# EAGLE board 9dof_block-GiantPanel-v10 (EAGLE 6.6.0), part 1 of 16
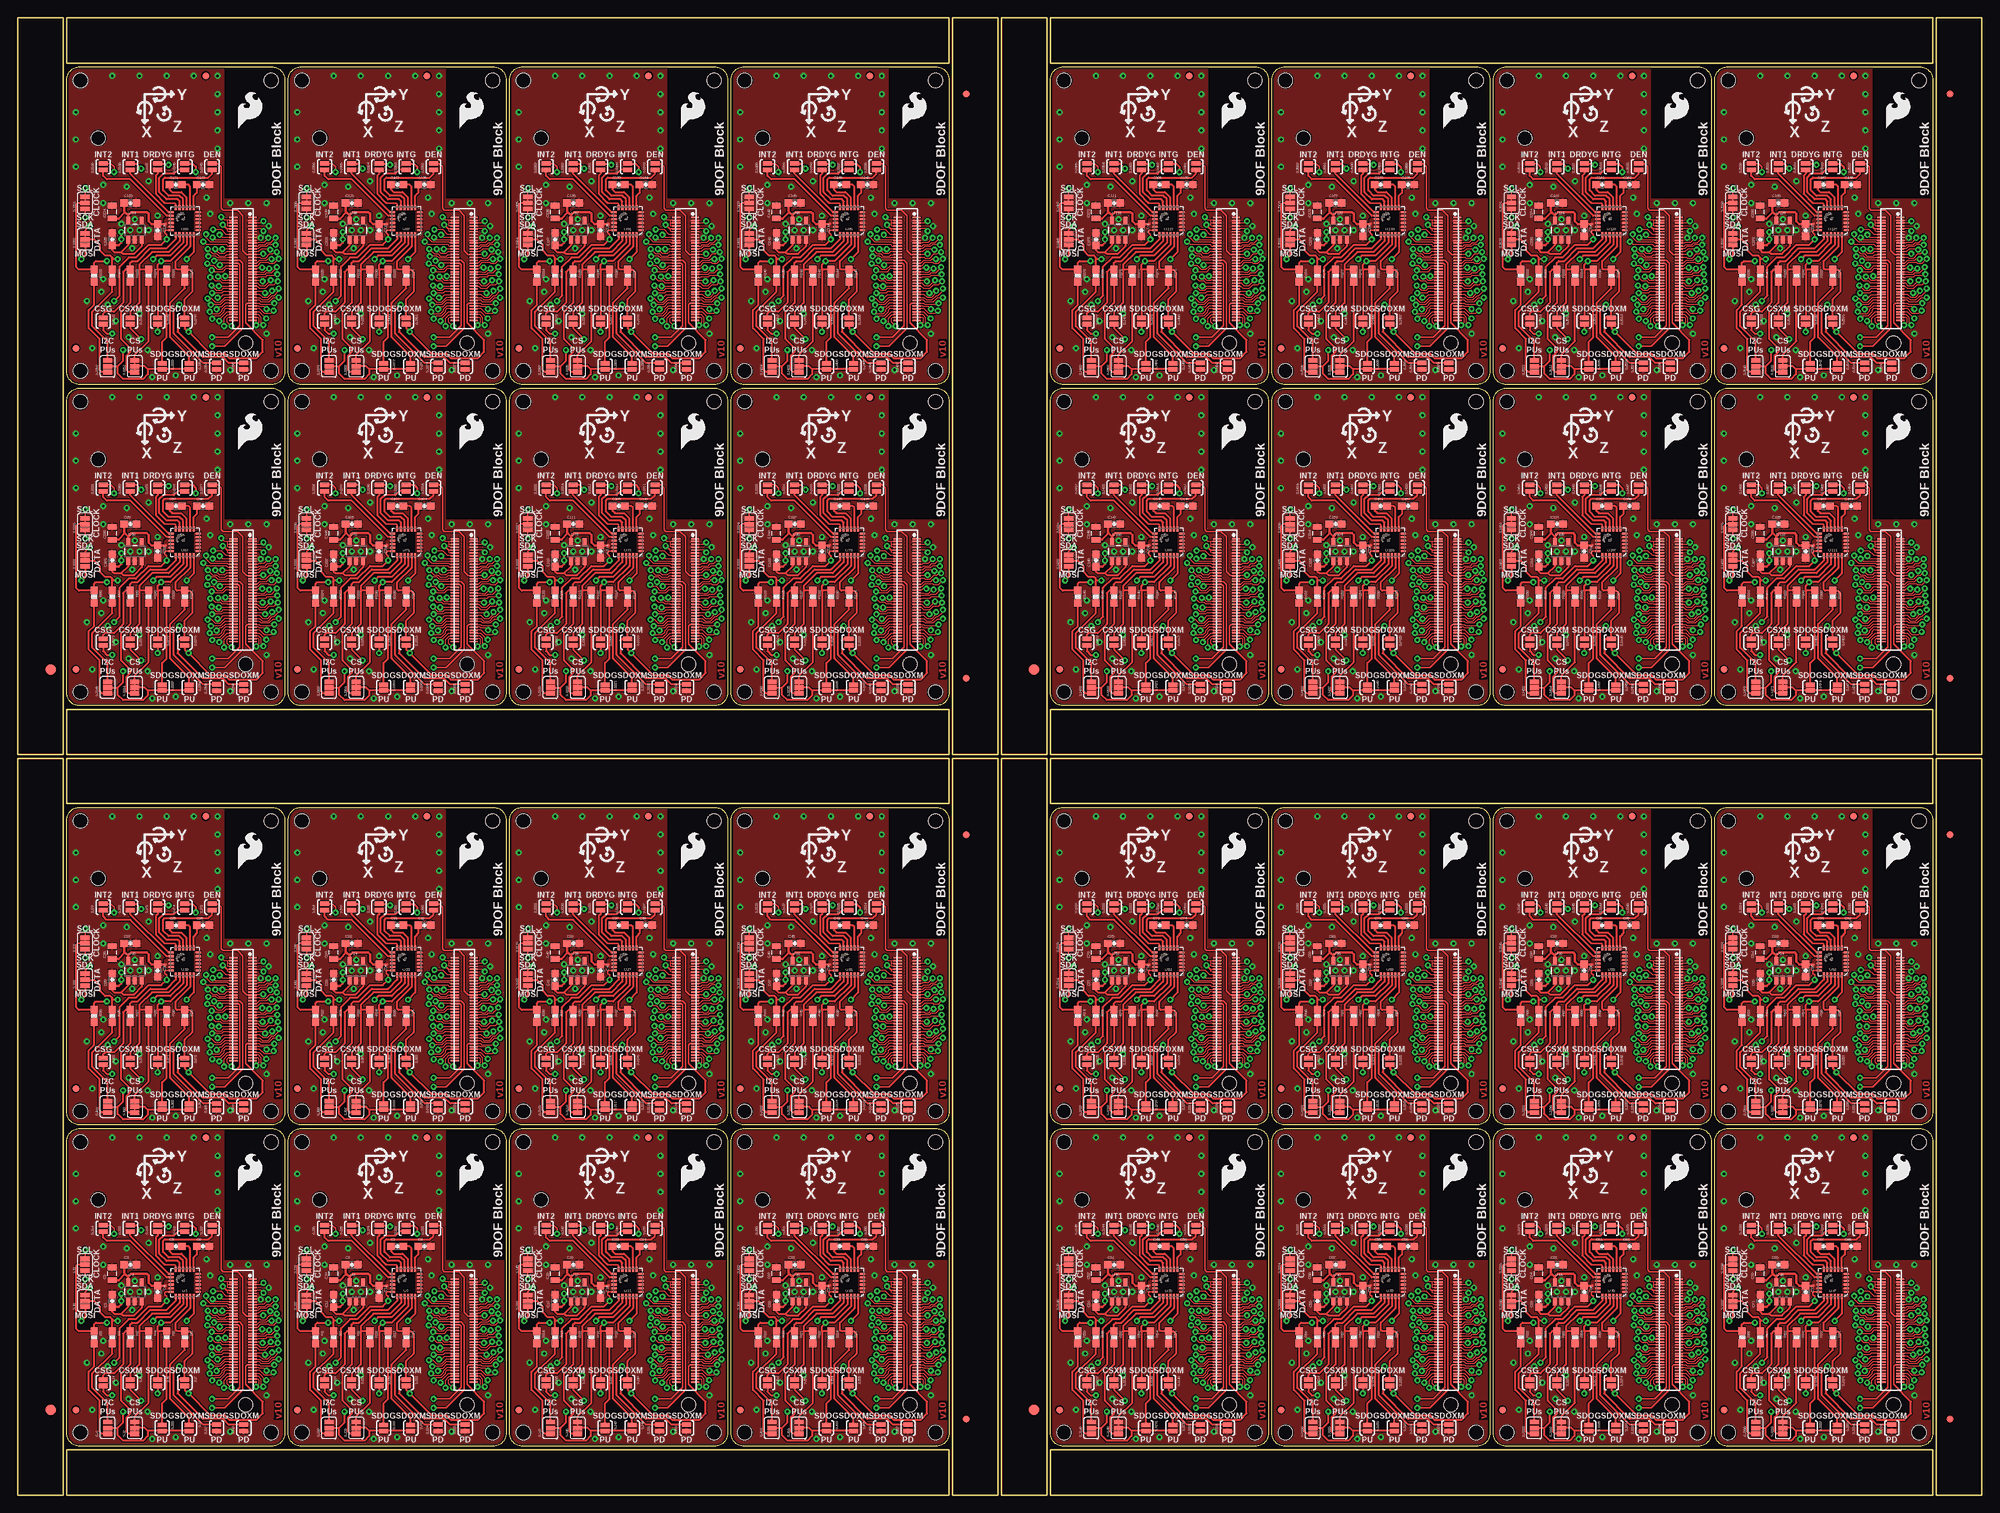
[diagram p0: board, top side]
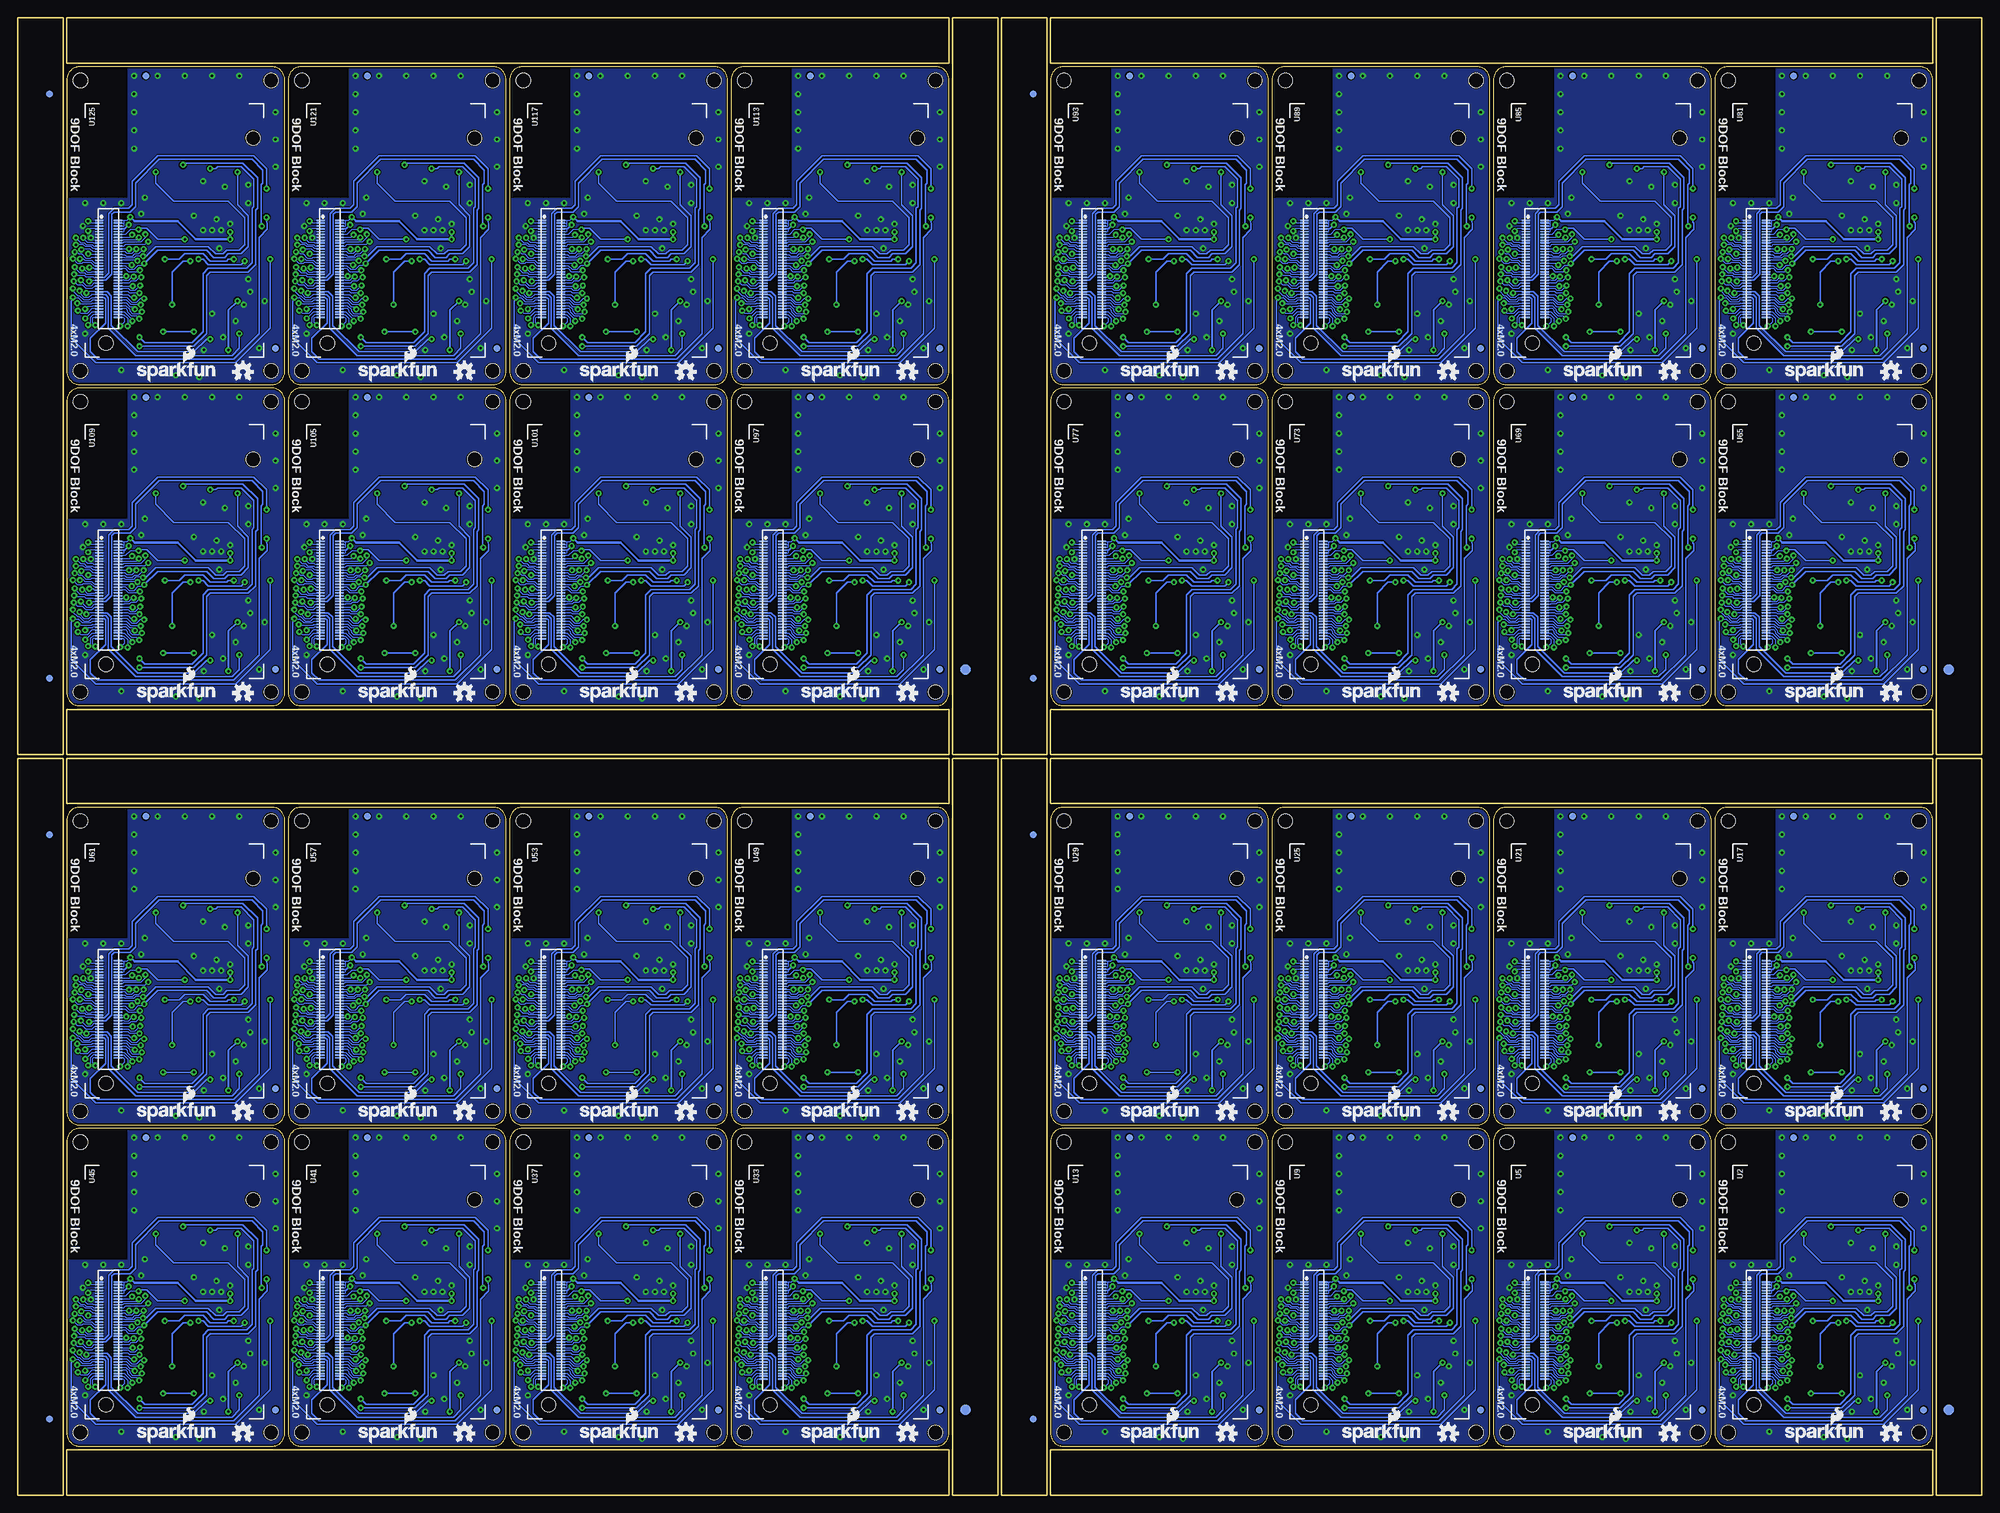
[diagram p1: board, bottom side, seen from below]

Size 274.83 x 206.76 mm. Coordinates in mm from the lower left corner, seen from the top.
Outline: 336 segments
Copper layers (1*16): Top 0.035mm / dielectric 1.5mm / Bottom 0.035mm
Design rules "SparkFun-2-layer *": minimum track width 6mil, minimum drill 13mil, track to track 6mil, track to pad 6mil, pad to pad 6mil, via to via 6mil, smd to smd 6mil, copper to edge 6mil, drill to drill 6mil, minimum pad ring 12mil, minimum via ring 10mil, stop-mask expansion 4mil, vias tented up to drill 20mil, thermal gap 6mil
Holes 2 mm at 35.43,8.76 8.76,8.76 8.76,49.4 35.43,49.4 66.42,8.76 39.75,8.76 39.75,49.4 66.42,49.4 97.41,8.76 70.74,8.76 70.74,49.4 97.41,49.4 128.4,8.76 101.73,8.76 101.73,49.4 128.4,49.4 35.43,53.72 8.76,53.72 8.76,94.36 35.43,94.36 66.42,53.72 39.75,53.72 39.75,94.36 66.42,94.36 97.41,53.72 70.74,53.72 70.74,94.36 97.41,94.36 128.4,53.72 101.73,53.72 101.73,94.36 128.4,94.36 173.1,8.76 146.43,8.76 146.43,49.4 173.1,49.4 204.09,8.76 177.42,8.76 177.42,49.4 204.09,49.4 235.08,8.76 208.41,8.76 208.41,49.4 235.08,49.4 266.06,8.76 239.4,8.76 239.4,49.4 266.06,49.4 173.1,53.72 146.43,53.72 146.43,94.36 173.1,94.36 204.09,53.72 177.42,53.72 177.42,94.36 204.09,94.36 235.08,53.72 208.41,53.72 208.41,94.36 235.08,94.36 266.06,53.72 239.4,53.72 239.4,94.36 266.06,94.36 35.43,112.39 8.76,112.39 8.76,153.03 35.43,153.03 66.42,112.39 39.75,112.39 39.75,153.03 66.42,153.03 97.41,112.39 70.74,112.39 70.74,153.03 97.41,153.03 128.4,112.39 101.73,112.39 101.73,153.03 128.4,153.03 35.43,157.35 8.76,157.35 8.76,197.99 35.43,197.99 66.42,157.35 39.75,157.35 39.75,197.99 66.42,197.99 97.41,157.35 70.74,157.35 70.74,197.99 97.41,197.99 128.4,157.35 101.73,157.35 101.73,197.99 128.4,197.99 173.1,112.39 146.43,112.39 146.43,153.03 173.1,153.03 204.09,112.39 177.42,112.39 177.42,153.03 204.09,153.03 235.08,112.39 208.41,112.39 208.41,153.03 235.08,153.03 266.06,112.39 239.4,112.39 239.4,153.03 266.06,153.03 173.1,157.35 146.43,157.35 146.43,197.99 173.1,197.99 204.09,157.35 177.42,157.35 177.42,197.99 204.09,197.99 235.08,157.35 208.41,157.35 208.41,197.99 235.08,197.99 266.06,157.35 239.4,157.35 239.4,197.99 266.06,197.99
tRestrict: area 29,33 to 37.3,51.3; area 22.1,28.4 to 24.6,31; area 59.9,33 to 68.3,51.3; area 53.1,28.4 to 55.6,31; area 90.9,33 to 99.3,51.3; area 84.1,28.4 to 86.6,31; area 121.9,33 to 130.3,51.3; area 115.1,28.4 to 117.6,31; area 29,78 to 37.3,96.3; area 22.1,73.4 to 24.6,75.9; area 59.9,78 to 68.3,96.3; area 53.1,73.4 to 55.6,75.9; 52 more areas; 224 lines
bRestrict: area 29,33 to 37.3,51.3; area 59.9,33 to 68.3,51.3; area 90.9,33 to 99.3,51.3; area 121.9,33 to 130.3,51.3; area 29,78 to 37.3,96.3; area 59.9,78 to 68.3,96.3; area 90.9,78 to 99.3,96.3; area 121.9,78 to 130.3,96.3; area 166.6,33 to 175,51.3; area 197.6,33 to 206,51.3; area 228.6,33 to 237,51.3; area 259.6,33 to 268,51.3; 20 more areas

## Footprints (pad centres in the part's own frame; a part is rotated, then mirrored left to right if it is on the bottom)
0603-CAP = smd 1.1 x 1: 1 -0.85,0; 2 0.85,0
0805 = smd 0.8 x 1.2: 1 -0.9,0; 2 0.9,0
FIDUCIAL-1.5X3 = smd 1.5 x 1.5: 1 0,0
FIDUCIAL-1X2 = smd 1 x 1: 1 0,0
0603-RES = smd 1.1 x 1: 1 -0.85,0; 2 0.85,0
PAD-JUMPER-3-NO_YES_SILK = smd 0.635 x 1.27: 1 -0.813,0; 2 0,0; 3 0.813,0
PAD-JUMPER-3-3OF3_NC_BY_TRACE_YES_SILK_FULL_BOX = smd 0.635 x 1.27: 1 -0.813,0; 2 0,0; 3 0.813,0
PAD-JUMPER-2-NC_BY_PASTE_YES_SILK = smd 0.635 x 1.27: 1 -0.401,0; 2 0.413,0
PAD-JUMPER-2-NO_YES_SILK = smd 0.635 x 1.27: 1 -0.45,0; 2 0.45,0
PAD-JUMPER-3-2OF3_NC_BY_TRACE_YES_SILK_FULL_BOX = smd 0.635 x 1.27: 1 -0.813,0; 2 0,0; 3 0.813,0
LGA-24 = smd 0.7 x 0.29: 1 -1.875,1.25; 2 -1.875,0.75; 3 -1.875,0.25; 4 -1.875,-0.25; 5 -1.875,-0.75; 6 -1.875,-1.25; 13 1.875,-1.25; 14 1.875,-0.75; 15 1.875,-0.25; 16 1.875,0.25; 17 1.875,0.75; 18 1.875,1.25 | smd 0.29 x 0.7: 7 -1.25,-1.875; 8 -0.75,-1.875; 9 -0.25,-1.875; 10 0.25,-1.875; 11 0.75,-1.875; 12 1.25,-1.875; 19 1.25,1.875; 20 0.75,1.875; 21 0.25,1.875; 22 -0.25,1.875; 23 -0.75,1.875; 24 -1.25,1.875
EDISON_DAUGHTER = smd 1.14 x 0.2: 1 1.98,19.17; 2 4.62,19.17; 3 1.98,18.77; 4 4.62,18.77; 5 1.98,18.37; 6 4.62,18.37; 7 1.98,17.97; 8 4.62,17.97; 9 1.98,17.57; 10 4.62,17.57; 11 1.98,17.17; 12 4.62,17.17; 13 1.98,16.77; 14 4.62,16.77; 15 1.98,16.37; 16 4.62,16.37; 17 1.98,15.97; 18 4.62,15.97; 19 1.98,15.57; 20 4.62,15.57; 21 1.98,15.17; 22 4.62,15.17; 23 1.98,14.77; 24 4.62,14.77; 25 1.98,14.37; 26 4.62,14.37; 27 1.98,13.97; 28 4.62,13.97; 29 1.98,13.57; 30 4.62,13.57; 31 1.98,13.17; 32 4.62,13.17; 33 1.98,12.77; 34 4.62,12.77; 35 1.98,12.37; 36 4.62,12.37; 37 1.98,11.97; 38 4.62,11.97; 39 1.98,11.57; 40 4.62,11.57; 41 1.98,11.17; 42 4.62,11.17; 43 1.98,10.77; 44 4.62,10.77; 45 1.98,10.37; 46 4.62,10.37; 47 1.98,9.97; 48 4.62,9.97; 49 1.98,9.57; 50 4.62,9.57; 51 1.98,9.17; 52 4.62,9.17; 53 1.98,8.77; 54 4.62,8.77; 55 1.98,8.37; 56 4.62,8.37; 57 1.98,7.97; 58 4.62,7.97; 59 1.98,7.57; 60 4.62,7.57; 61 1.98,7.17; 62 4.62,7.17; 63 1.98,6.77; 64 4.62,6.77; 65 1.98,6.37; 66 4.62,6.37; 67 1.98,5.97; 68 4.62,5.97; 69 1.98,5.57; 70 4.62,5.57 | hole 2: 23.53,30.67; 2.93,1.98
DF40C-70DP-0.4(51) = smd 0.2 x 1.14 bottom: 1 6.8,1.32; 2 6.8,-1.32; 3 6.4,1.32; 4 6.4,-1.32; 5 6,1.32; 6 6,-1.32; 7 5.6,1.32; 8 5.6,-1.32; 9 5.2,1.32; 10 5.2,-1.32; 11 4.8,1.32; 12 4.8,-1.32; 13 4.4,1.32; 14 4.4,-1.32; 15 4,1.32; 16 4,-1.32; 17 3.6,1.32; 18 3.6,-1.32; 19 3.2,1.32; 20 3.2,-1.32; 21 2.8,1.32; 22 2.8,-1.32; 23 2.4,1.32; 24 2.4,-1.32; 25 2,1.32; 26 2,-1.32; 27 1.6,1.32; 28 1.6,-1.32; 29 1.2,1.32; 30 1.2,-1.32; 31 0.8,1.32; 32 0.8,-1.32; 33 0.4,1.32; 34 0.4,-1.32; 35 0,1.32; 36 0,-1.32; 37 -0.4,1.32; 38 -0.4,-1.32; 39 -0.8,1.32; 40 -0.8,-1.32; 41 -1.2,1.32; 42 -1.2,-1.32; 43 -1.6,1.32; 44 -1.6,-1.32; 45 -2,1.32; 46 -2,-1.32; 47 -2.4,1.32; 48 -2.4,-1.32; 49 -2.8,1.32; 50 -2.8,-1.32; 51 -3.2,1.32; 52 -3.2,-1.32; 53 -3.6,1.32; 54 -3.6,-1.32; 55 -4,1.32; 56 -4,-1.32; 57 -4.4,1.32; 58 -4.4,-1.32; 59 -4.8,1.32; 60 -4.8,-1.32; 61 -5.2,1.32; 62 -5.2,-1.32; 63 -5.6,1.32; 64 -5.6,-1.32; 65 -6,1.32; 66 -6,-1.32; 67 -6.4,1.32; 68 -6.4,-1.32; 69 -6.8,1.32; 70 -6.8,-1.32; NC1 7.2,1.32; NC2 7.2,-1.32; NC3 -7.2,-1.32; NC4 -7.2,1.32
SOT23-5 = smd 0.55 x 1.2: 1 -0.95,-1.3; 2 0,-1.3; 3 0.95,-1.3; 4 0.95,1.3; 5 -0.95,1.3

## Placement (x,y rotation side)
C1  1.0uF  [0603-CAP]  13.21,27.18 90 top
C2  10uF  [0805]  13.21,30.99 90 top
C3  1.0uF  [0603-CAP]  15.75,32.26 0 top
C4  0.1uF  [0603-CAP]  19.56,28.45 270 top
C5  0.22uF  [0603-CAP]  22.1,34.8 0 top
C6  4.7uF  [0603-CAP]  25.91,34.8 0 top
C7  0.22uF  [0603-CAP]  53.09,34.8 0 top
C8  4.7uF  [0603-CAP]  56.9,34.8 0 top
C9  1.0uF  [0603-CAP]  46.74,32.26 0 top
C10  10uF  [0805]  44.2,30.99 90 top
C11  1.0uF  [0603-CAP]  44.2,27.18 90 top
C12  0.1uF  [0603-CAP]  50.55,28.45 270 top
C13  0.22uF  [0603-CAP]  84.07,34.8 0 top
C14  4.7uF  [0603-CAP]  87.88,34.8 0 top
C15  1.0uF  [0603-CAP]  77.72,32.26 0 top
C16  10uF  [0805]  75.18,30.99 90 top
C17  1.0uF  [0603-CAP]  75.18,27.18 90 top
C18  0.1uF  [0603-CAP]  81.53,28.45 270 top
C19  0.22uF  [0603-CAP]  115.06,34.8 0 top
C20  4.7uF  [0603-CAP]  118.87,34.8 0 top
C21  1.0uF  [0603-CAP]  108.71,32.26 0 top
C22  10uF  [0805]  106.17,30.99 90 top
C23  1.0uF  [0603-CAP]  106.17,27.18 90 top
C24  0.1uF  [0603-CAP]  112.52,28.45 270 top
C25  0.22uF  [0603-CAP]  22.1,79.76 0 top
C26  4.7uF  [0603-CAP]  25.91,79.76 0 top
C27  1.0uF  [0603-CAP]  15.75,77.22 0 top
C28  10uF  [0805]  13.21,75.95 90 top
C29  1.0uF  [0603-CAP]  13.21,72.14 90 top
C30  0.1uF  [0603-CAP]  19.56,73.41 270 top
C31  0.22uF  [0603-CAP]  53.09,79.76 0 top
C32  4.7uF  [0603-CAP]  56.9,79.76 0 top
C33  1.0uF  [0603-CAP]  46.74,77.22 0 top
C34  10uF  [0805]  44.2,75.95 90 top
C35  1.0uF  [0603-CAP]  44.2,72.14 90 top
C36  0.1uF  [0603-CAP]  50.55,73.41 270 top
C37  0.22uF  [0603-CAP]  84.07,79.76 0 top
C38  4.7uF  [0603-CAP]  87.88,79.76 0 top
C39  1.0uF  [0603-CAP]  77.72,77.22 0 top
C40  10uF  [0805]  75.18,75.95 90 top
C41  1.0uF  [0603-CAP]  75.18,72.14 90 top
C42  0.1uF  [0603-CAP]  81.53,73.41 270 top
C43  0.22uF  [0603-CAP]  115.06,79.76 0 top
C44  4.7uF  [0603-CAP]  118.87,79.76 0 top
C45  1.0uF  [0603-CAP]  108.71,77.22 0 top
C46  10uF  [0805]  106.17,75.95 90 top
C47  1.0uF  [0603-CAP]  106.17,72.14 90 top
C48  0.1uF  [0603-CAP]  112.52,73.41 270 top
C49  0.22uF  [0603-CAP]  159.77,34.8 0 top
C50  4.7uF  [0603-CAP]  163.58,34.8 0 top
C51  1.0uF  [0603-CAP]  153.42,32.26 0 top
C52  10uF  [0805]  150.88,30.99 90 top
C53  1.0uF  [0603-CAP]  150.88,27.18 90 top
C54  0.1uF  [0603-CAP]  157.23,28.45 270 top
C55  0.22uF  [0603-CAP]  190.75,34.8 0 top
C56  4.7uF  [0603-CAP]  194.56,34.8 0 top
C57  1.0uF  [0603-CAP]  184.4,32.26 0 top
C58  10uF  [0805]  181.86,30.99 90 top
C59  1.0uF  [0603-CAP]  181.86,27.18 90 top
C60  0.1uF  [0603-CAP]  188.21,28.45 270 top
C61  0.22uF  [0603-CAP]  221.74,34.8 0 top
C62  4.7uF  [0603-CAP]  225.55,34.8 0 top
C63  1.0uF  [0603-CAP]  215.39,32.26 0 top
C64  10uF  [0805]  212.85,30.99 90 top
C65  1.0uF  [0603-CAP]  212.85,27.18 90 top
C66  0.1uF  [0603-CAP]  219.2,28.45 270 top
C67  0.22uF  [0603-CAP]  252.73,34.8 0 top
C68  4.7uF  [0603-CAP]  256.54,34.8 0 top
C69  1.0uF  [0603-CAP]  246.38,32.26 0 top
C70  10uF  [0805]  243.84,30.99 90 top
C71  1.0uF  [0603-CAP]  243.84,27.18 90 top
C72  0.1uF  [0603-CAP]  250.19,28.45 270 top
C73  0.22uF  [0603-CAP]  159.77,79.76 0 top
C74  4.7uF  [0603-CAP]  163.58,79.76 0 top
C75  1.0uF  [0603-CAP]  153.42,77.22 0 top
C76  10uF  [0805]  150.88,75.95 90 top
C77  1.0uF  [0603-CAP]  150.88,72.14 90 top
C78  0.1uF  [0603-CAP]  157.23,73.41 270 top
C79  0.22uF  [0603-CAP]  190.75,79.76 0 top
C80  4.7uF  [0603-CAP]  194.56,79.76 0 top
C81  1.0uF  [0603-CAP]  184.4,77.22 0 top
C82  10uF  [0805]  181.86,75.95 90 top
C83  1.0uF  [0603-CAP]  181.86,72.14 90 top
C84  0.1uF  [0603-CAP]  188.21,73.41 270 top
C85  0.22uF  [0603-CAP]  221.74,79.76 0 top
C86  4.7uF  [0603-CAP]  225.55,79.76 0 top
C87  1.0uF  [0603-CAP]  215.39,77.22 0 top
C88  10uF  [0805]  212.85,75.95 90 top
C89  1.0uF  [0603-CAP]  212.85,72.14 90 top
C90  0.1uF  [0603-CAP]  219.2,73.41 270 top
C91  0.22uF  [0603-CAP]  252.73,79.76 0 top
C92  4.7uF  [0603-CAP]  256.54,79.76 0 top
C93  1.0uF  [0603-CAP]  246.38,77.22 0 top
C94  10uF  [0805]  243.84,75.95 90 top
C95  1.0uF  [0603-CAP]  243.84,72.14 90 top
C96  0.1uF  [0603-CAP]  250.19,73.41 270 top
C97  0.22uF  [0603-CAP]  22.1,138.43 0 top
C98  4.7uF  [0603-CAP]  25.91,138.43 0 top
C99  1.0uF  [0603-CAP]  15.75,135.89 0 top
C100  10uF  [0805]  13.21,134.62 90 top
C101  1.0uF  [0603-CAP]  13.21,130.81 90 top
C102  0.1uF  [0603-CAP]  19.56,132.08 270 top
C103  0.22uF  [0603-CAP]  53.09,138.43 0 top
C104  4.7uF  [0603-CAP]  56.9,138.43 0 top
C105  1.0uF  [0603-CAP]  46.74,135.89 0 top
C106  10uF  [0805]  44.2,134.62 90 top
C107  1.0uF  [0603-CAP]  44.2,130.81 90 top
C108  0.1uF  [0603-CAP]  50.55,132.08 270 top
C109  0.22uF  [0603-CAP]  84.07,138.43 0 top
C110  4.7uF  [0603-CAP]  87.88,138.43 0 top
C111  1.0uF  [0603-CAP]  77.72,135.89 0 top
C112  10uF  [0805]  75.18,134.62 90 top
C113  1.0uF  [0603-CAP]  75.18,130.81 90 top
C114  0.1uF  [0603-CAP]  81.53,132.08 270 top
C115  0.22uF  [0603-CAP]  115.06,138.43 0 top
C116  4.7uF  [0603-CAP]  118.87,138.43 0 top
C117  1.0uF  [0603-CAP]  108.71,135.89 0 top
C118  10uF  [0805]  106.17,134.62 90 top
C119  1.0uF  [0603-CAP]  106.17,130.81 90 top
C120  0.1uF  [0603-CAP]  112.52,132.08 270 top
C121  0.22uF  [0603-CAP]  22.1,183.39 0 top
C122  4.7uF  [0603-CAP]  25.91,183.39 0 top
C123  1.0uF  [0603-CAP]  15.75,180.85 0 top
C124  10uF  [0805]  13.21,179.58 90 top
C125  1.0uF  [0603-CAP]  13.21,175.77 90 top
C126  0.1uF  [0603-CAP]  19.56,177.04 270 top
C127  0.22uF  [0603-CAP]  53.09,183.39 0 top
C128  4.7uF  [0603-CAP]  56.9,183.39 0 top
C129  1.0uF  [0603-CAP]  46.74,180.85 0 top
C130  10uF  [0805]  44.2,179.58 90 top
C131  1.0uF  [0603-CAP]  44.2,175.77 90 top
C132  0.1uF  [0603-CAP]  50.55,177.04 270 top
C133  0.22uF  [0603-CAP]  84.07,183.39 0 top
C134  4.7uF  [0603-CAP]  87.88,183.39 0 top
C135  1.0uF  [0603-CAP]  77.72,180.85 0 top
C136  10uF  [0805]  75.18,179.58 90 top
C137  1.0uF  [0603-CAP]  75.18,175.77 90 top
C138  0.1uF  [0603-CAP]  81.53,177.04 270 top
C139  0.22uF  [0603-CAP]  115.06,183.39 0 top
C140  4.7uF  [0603-CAP]  118.87,183.39 0 top
C141  1.0uF  [0603-CAP]  108.71,180.85 0 top
C142  10uF  [0805]  106.17,179.58 90 top
C143  1.0uF  [0603-CAP]  106.17,175.77 90 top
C144  0.1uF  [0603-CAP]  112.52,177.04 270 top
C145  0.22uF  [0603-CAP]  159.77,138.43 0 top
C146  4.7uF  [0603-CAP]  163.58,138.43 0 top
C147  1.0uF  [0603-CAP]  153.42,135.89 0 top
C148  10uF  [0805]  150.88,134.62 90 top
C149  1.0uF  [0603-CAP]  150.88,130.81 90 top
C150  0.1uF  [0603-CAP]  157.23,132.08 270 top
C151  0.22uF  [0603-CAP]  190.75,138.43 0 top
C152  4.7uF  [0603-CAP]  194.56,138.43 0 top
C153  1.0uF  [0603-CAP]  184.4,135.89 0 top
C154  10uF  [0805]  181.86,134.62 90 top
C155  1.0uF  [0603-CAP]  181.86,130.81 90 top
C156  0.1uF  [0603-CAP]  188.21,132.08 270 top
C157  0.22uF  [0603-CAP]  221.74,138.43 0 top
C158  4.7uF  [0603-CAP]  225.55,138.43 0 top
C159  1.0uF  [0603-CAP]  215.39,135.89 0 top
C160  10uF  [0805]  212.85,134.62 90 top
C161  1.0uF  [0603-CAP]  212.85,130.81 90 top
C162  0.1uF  [0603-CAP]  219.2,132.08 270 top
C163  0.22uF  [0603-CAP]  252.73,138.43 0 top
C164  4.7uF  [0603-CAP]  256.54,138.43 0 top
C165  1.0uF  [0603-CAP]  246.38,135.89 0 top
C166  10uF  [0805]  243.84,134.62 90 top
C167  1.0uF  [0603-CAP]  243.84,130.81 90 top
C168  0.1uF  [0603-CAP]  250.19,132.08 270 top
C169  0.22uF  [0603-CAP]  159.77,183.39 0 top
C170  4.7uF  [0603-CAP]  163.58,183.39 0 top
C171  1.0uF  [0603-CAP]  153.42,180.85 0 top
C172  10uF  [0805]  150.88,179.58 90 top
C173  1.0uF  [0603-CAP]  150.88,175.77 90 top
C174  0.1uF  [0603-CAP]  157.23,177.04 270 top
C175  0.22uF  [0603-CAP]  190.75,183.39 0 top
C176  4.7uF  [0603-CAP]  194.56,183.39 0 top
C177  1.0uF  [0603-CAP]  184.4,180.85 0 top
C178  10uF  [0805]  181.86,179.58 90 top
C179  1.0uF  [0603-CAP]  181.86,175.77 90 top
C180  0.1uF  [0603-CAP]  188.21,177.04 270 top
C181  0.22uF  [0603-CAP]  221.74,183.39 0 top
C182  4.7uF  [0603-CAP]  225.55,183.39 0 top
C183  1.0uF  [0603-CAP]  215.39,180.85 0 top
C184  10uF  [0805]  212.85,179.58 90 top
C185  1.0uF  [0603-CAP]  212.85,175.77 90 top
C186  0.1uF  [0603-CAP]  219.2,177.04 270 top
C187  0.22uF  [0603-CAP]  252.73,183.39 0 top
C188  4.7uF  [0603-CAP]  256.54,183.39 0 top
C189  1.0uF  [0603-CAP]  246.38,180.85 0 top
C190  10uF  [0805]  243.84,179.58 90 top
C191  1.0uF  [0603-CAP]  243.84,175.77 90 top
C192  0.1uF  [0603-CAP]  250.19,177.04 270 top
E$1  [FIDUCIAL-1.5X3]  4.57,11.94 0 top
E$2  [FIDUCIAL-1.5X3]  4.57,11.94 0 bottom
E$3  [FIDUCIAL-1X2]  132.72,92.46 180 bottom
E$4  [FIDUCIAL-1X2]  132.72,10.67 0 top
E$5  [FIDUCIAL-1X2]  132.72,92.46 180 top
E$6  [FIDUCIAL-1X2]  132.72,10.67 0 bottom
E$7  [FIDUCIAL-1X2]  270.38,10.67 0 top
E$8  [FIDUCIAL-1X2]  270.38,92.46 180 top
E$9  [FIDUCIAL-1.5X3]  142.24,11.94 0 top
E$10  [FIDUCIAL-1.5X3]  142.24,11.94 0 bottom
E$11  [FIDUCIAL-1X2]  270.38,92.46 180 bottom
E$12  [FIDUCIAL-1X2]  270.38,10.67 0 bottom
E$13  [FIDUCIAL-1X2]  132.72,114.3 0 top
E$14  [FIDUCIAL-1X2]  132.72,196.09 180 top
E$15  [FIDUCIAL-1.5X3]  4.57,115.57 0 top
E$16  [FIDUCIAL-1.5X3]  4.57,115.57 0 bottom
E$17  [FIDUCIAL-1X2]  132.72,196.09 180 bottom
E$18  [FIDUCIAL-1X2]  132.72,114.3 0 bottom
E$19  [FIDUCIAL-1X2]  270.38,114.3 0 top
E$20  [FIDUCIAL-1X2]  270.38,196.09 180 top
E$21  [FIDUCIAL-1.5X3]  142.24,115.57 0 top
E$22  [FIDUCIAL-1.5X3]  142.24,115.57 0 bottom
E$23  [FIDUCIAL-1X2]  270.38,196.09 180 bottom
E$24  [FIDUCIAL-1X2]  270.38,114.3 0 bottom
FID1  FIDUCIAL1X2  [FIDUCIAL-1X2]  8.13,11.94 0 top
FID2  FIDUCIAL1X2  [FIDUCIAL-1X2]  26.29,50.04 0 top
FID3  FIDUCIAL1X2  [FIDUCIAL-1X2]  26.29,50.04 0 bottom
FID4  FIDUCIAL1X2  [FIDUCIAL-1X2]  8.13,11.94 0 bottom
FID5  FIDUCIAL1X2  [FIDUCIAL-1X2]  39.12,11.94 0 top
FID6  FIDUCIAL1X2  [FIDUCIAL-1X2]  57.28,50.04 0 top
FID7  FIDUCIAL1X2  [FIDUCIAL-1X2]  57.28,50.04 0 bottom
FID8  FIDUCIAL1X2  [FIDUCIAL-1X2]  39.12,11.94 0 bottom
FID9  FIDUCIAL1X2  [FIDUCIAL-1X2]  70.1,11.94 0 top
FID10  FIDUCIAL1X2  [FIDUCIAL-1X2]  88.27,50.04 0 top
FID11  FIDUCIAL1X2  [FIDUCIAL-1X2]  88.27,50.04 0 bottom
FID12  FIDUCIAL1X2  [FIDUCIAL-1X2]  70.1,11.94 0 bottom
FID13  FIDUCIAL1X2  [FIDUCIAL-1X2]  101.09,11.94 0 top
FID14  FIDUCIAL1X2  [FIDUCIAL-1X2]  119.25,50.04 0 top
FID15  FIDUCIAL1X2  [FIDUCIAL-1X2]  119.25,50.04 0 bottom
FID16  FIDUCIAL1X2  [FIDUCIAL-1X2]  101.09,11.94 0 bottom
FID17  FIDUCIAL1X2  [FIDUCIAL-1X2]  8.13,56.9 0 top
FID18  FIDUCIAL1X2  [FIDUCIAL-1X2]  26.29,95 0 top
FID19  FIDUCIAL1X2  [FIDUCIAL-1X2]  26.29,95 0 bottom
FID20  FIDUCIAL1X2  [FIDUCIAL-1X2]  8.13,56.9 0 bottom
FID21  FIDUCIAL1X2  [FIDUCIAL-1X2]  39.12,56.9 0 top
FID22  FIDUCIAL1X2  [FIDUCIAL-1X2]  57.28,95 0 top
FID23  FIDUCIAL1X2  [FIDUCIAL-1X2]  57.28,95 0 bottom
FID24  FIDUCIAL1X2  [FIDUCIAL-1X2]  39.12,56.9 0 bottom
FID25  FIDUCIAL1X2  [FIDUCIAL-1X2]  70.1,56.9 0 top
FID26  FIDUCIAL1X2  [FIDUCIAL-1X2]  88.27,95 0 top
FID27  FIDUCIAL1X2  [FIDUCIAL-1X2]  88.27,95 0 bottom
FID28  FIDUCIAL1X2  [FIDUCIAL-1X2]  70.1,56.9 0 bottom
FID29  FIDUCIAL1X2  [FIDUCIAL-1X2]  101.09,56.9 0 top
FID30  FIDUCIAL1X2  [FIDUCIAL-1X2]  119.25,95 0 top
FID31  FIDUCIAL1X2  [FIDUCIAL-1X2]  119.25,95 0 bottom
FID32  FIDUCIAL1X2  [FIDUCIAL-1X2]  101.09,56.9 0 bottom
FID33  FIDUCIAL1X2  [FIDUCIAL-1X2]  145.8,11.94 0 top
FID34  FIDUCIAL1X2  [FIDUCIAL-1X2]  163.96,50.04 0 top
FID35  FIDUCIAL1X2  [FIDUCIAL-1X2]  163.96,50.04 0 bottom
FID36  FIDUCIAL1X2  [FIDUCIAL-1X2]  145.8,11.94 0 bottom
FID37  FIDUCIAL1X2  [FIDUCIAL-1X2]  176.78,11.94 0 top
FID38  FIDUCIAL1X2  [FIDUCIAL-1X2]  194.94,50.04 0 top
FID39  FIDUCIAL1X2  [FIDUCIAL-1X2]  194.94,50.04 0 bottom
FID40  FIDUCIAL1X2  [FIDUCIAL-1X2]  176.78,11.94 0 bottom
FID41  FIDUCIAL1X2  [FIDUCIAL-1X2]  207.77,11.94 0 top
FID42  FIDUCIAL1X2  [FIDUCIAL-1X2]  225.93,50.04 0 top
FID43  FIDUCIAL1X2  [FIDUCIAL-1X2]  225.93,50.04 0 bottom
FID44  FIDUCIAL1X2  [FIDUCIAL-1X2]  207.77,11.94 0 bottom
FID45  FIDUCIAL1X2  [FIDUCIAL-1X2]  238.76,11.94 0 top
FID46  FIDUCIAL1X2  [FIDUCIAL-1X2]  256.92,50.04 0 top
FID47  FIDUCIAL1X2  [FIDUCIAL-1X2]  256.92,50.04 0 bottom
FID48  FIDUCIAL1X2  [FIDUCIAL-1X2]  238.76,11.94 0 bottom
FID49  FIDUCIAL1X2  [FIDUCIAL-1X2]  145.8,56.9 0 top
FID50  FIDUCIAL1X2  [FIDUCIAL-1X2]  163.96,95 0 top
FID51  FIDUCIAL1X2  [FIDUCIAL-1X2]  163.96,95 0 bottom
FID52  FIDUCIAL1X2  [FIDUCIAL-1X2]  145.8,56.9 0 bottom
FID53  FIDUCIAL1X2  [FIDUCIAL-1X2]  176.78,56.9 0 top
FID54  FIDUCIAL1X2  [FIDUCIAL-1X2]  194.94,95 0 top
FID55  FIDUCIAL1X2  [FIDUCIAL-1X2]  194.94,95 0 bottom
FID56  FIDUCIAL1X2  [FIDUCIAL-1X2]  176.78,56.9 0 bottom
FID57  FIDUCIAL1X2  [FIDUCIAL-1X2]  207.77,56.9 0 top
FID58  FIDUCIAL1X2  [FIDUCIAL-1X2]  225.93,95 0 top
FID59  FIDUCIAL1X2  [FIDUCIAL-1X2]  225.93,95 0 bottom
FID60  FIDUCIAL1X2  [FIDUCIAL-1X2]  207.77,56.9 0 bottom
FID61  FIDUCIAL1X2  [FIDUCIAL-1X2]  238.76,56.9 0 top
FID62  FIDUCIAL1X2  [FIDUCIAL-1X2]  256.92,95 0 top
FID63  FIDUCIAL1X2  [FIDUCIAL-1X2]  256.92,95 0 bottom
FID64  FIDUCIAL1X2  [FIDUCIAL-1X2]  238.76,56.9 0 bottom
FID65  FIDUCIAL1X2  [FIDUCIAL-1X2]  8.13,115.57 0 top
FID66  FIDUCIAL1X2  [FIDUCIAL-1X2]  26.29,153.67 0 top
FID67  FIDUCIAL1X2  [FIDUCIAL-1X2]  26.29,153.67 0 bottom
FID68  FIDUCIAL1X2  [FIDUCIAL-1X2]  8.13,115.57 0 bottom
FID69  FIDUCIAL1X2  [FIDUCIAL-1X2]  39.12,115.57 0 top
FID70  FIDUCIAL1X2  [FIDUCIAL-1X2]  57.28,153.67 0 top
FID71  FIDUCIAL1X2  [FIDUCIAL-1X2]  57.28,153.67 0 bottom
FID72  FIDUCIAL1X2  [FIDUCIAL-1X2]  39.12,115.57 0 bottom
FID73  FIDUCIAL1X2  [FIDUCIAL-1X2]  70.1,115.57 0 top
FID74  FIDUCIAL1X2  [FIDUCIAL-1X2]  88.27,153.67 0 top
FID75  FIDUCIAL1X2  [FIDUCIAL-1X2]  88.27,153.67 0 bottom
FID76  FIDUCIAL1X2  [FIDUCIAL-1X2]  70.1,115.57 0 bottom
FID77  FIDUCIAL1X2  [FIDUCIAL-1X2]  101.09,115.57 0 top
FID78  FIDUCIAL1X2  [FIDUCIAL-1X2]  119.25,153.67 0 top
FID79  FIDUCIAL1X2  [FIDUCIAL-1X2]  119.25,153.67 0 bottom
FID80  FIDUCIAL1X2  [FIDUCIAL-1X2]  101.09,115.57 0 bottom
FID81  FIDUCIAL1X2  [FIDUCIAL-1X2]  8.13,160.53 0 top
FID82  FIDUCIAL1X2  [FIDUCIAL-1X2]  26.29,198.63 0 top
FID83  FIDUCIAL1X2  [FIDUCIAL-1X2]  26.29,198.63 0 bottom
FID84  FIDUCIAL1X2  [FIDUCIAL-1X2]  8.13,160.53 0 bottom
FID85  FIDUCIAL1X2  [FIDUCIAL-1X2]  39.12,160.53 0 top
FID86  FIDUCIAL1X2  [FIDUCIAL-1X2]  57.28,198.63 0 top
FID87  FIDUCIAL1X2  [FIDUCIAL-1X2]  57.28,198.63 0 bottom
FID88  FIDUCIAL1X2  [FIDUCIAL-1X2]  39.12,160.53 0 bottom
FID89  FIDUCIAL1X2  [FIDUCIAL-1X2]  70.1,160.53 0 top
FID90  FIDUCIAL1X2  [FIDUCIAL-1X2]  88.27,198.63 0 top
FID91  FIDUCIAL1X2  [FIDUCIAL-1X2]  88.27,198.63 0 bottom
FID92  FIDUCIAL1X2  [FIDUCIAL-1X2]  70.1,160.53 0 bottom
FID93  FIDUCIAL1X2  [FIDUCIAL-1X2]  101.09,160.53 0 top
FID94  FIDUCIAL1X2  [FIDUCIAL-1X2]  119.25,198.63 0 top
FID95  FIDUCIAL1X2  [FIDUCIAL-1X2]  119.25,198.63 0 bottom
FID96  FIDUCIAL1X2  [FIDUCIAL-1X2]  101.09,160.53 0 bottom
FID97  FIDUCIAL1X2  [FIDUCIAL-1X2]  145.8,115.57 0 top
FID98  FIDUCIAL1X2  [FIDUCIAL-1X2]  163.96,153.67 0 top
FID99  FIDUCIAL1X2  [FIDUCIAL-1X2]  163.96,153.67 0 bottom
FID100  FIDUCIAL1X2  [FIDUCIAL-1X2]  145.8,115.57 0 bottom
FID101  FIDUCIAL1X2  [FIDUCIAL-1X2]  176.78,115.57 0 top
FID102  FIDUCIAL1X2  [FIDUCIAL-1X2]  194.94,153.67 0 top
FID103  FIDUCIAL1X2  [FIDUCIAL-1X2]  194.94,153.67 0 bottom
FID104  FIDUCIAL1X2  [FIDUCIAL-1X2]  176.78,115.57 0 bottom
FID105  FIDUCIAL1X2  [FIDUCIAL-1X2]  207.77,115.57 0 top
FID106  FIDUCIAL1X2  [FIDUCIAL-1X2]  225.93,153.67 0 top
FID107  FIDUCIAL1X2  [FIDUCIAL-1X2]  225.93,153.67 0 bottom
FID108  FIDUCIAL1X2  [FIDUCIAL-1X2]  207.77,115.57 0 bottom
FID109  FIDUCIAL1X2  [FIDUCIAL-1X2]  238.76,115.57 0 top
FID110  FIDUCIAL1X2  [FIDUCIAL-1X2]  256.92,153.67 0 top
FID111  FIDUCIAL1X2  [FIDUCIAL-1X2]  256.92,153.67 0 bottom
FID112  FIDUCIAL1X2  [FIDUCIAL-1X2]  238.76,115.57 0 bottom
FID113  FIDUCIAL1X2  [FIDUCIAL-1X2]  145.8,160.53 0 top
FID114  FIDUCIAL1X2  [FIDUCIAL-1X2]  163.96,198.63 0 top
FID115  FIDUCIAL1X2  [FIDUCIAL-1X2]  163.96,198.63 0 bottom
FID116  FIDUCIAL1X2  [FIDUCIAL-1X2]  145.8,160.53 0 bottom
FID117  FIDUCIAL1X2  [FIDUCIAL-1X2]  176.78,160.53 0 top
FID118  FIDUCIAL1X2  [FIDUCIAL-1X2]  194.94,198.63 0 top
FID119  FIDUCIAL1X2  [FIDUCIAL-1X2]  194.94,198.63 0 bottom
FID120  FIDUCIAL1X2  [FIDUCIAL-1X2]  176.78,160.53 0 bottom
FID121  FIDUCIAL1X2  [FIDUCIAL-1X2]  207.77,160.53 0 top
FID122  FIDUCIAL1X2  [FIDUCIAL-1X2]  225.93,198.63 0 top
FID123  FIDUCIAL1X2  [FIDUCIAL-1X2]  225.93,198.63 0 bottom
FID124  FIDUCIAL1X2  [FIDUCIAL-1X2]  207.77,160.53 0 bottom
FID125  FIDUCIAL1X2  [FIDUCIAL-1X2]  238.76,160.53 0 top
FID126  FIDUCIAL1X2  [FIDUCIAL-1X2]  256.92,198.63 0 top
FID127  FIDUCIAL1X2  [FIDUCIAL-1X2]  256.92,198.63 0 bottom
FID128  FIDUCIAL1X2  [FIDUCIAL-1X2]  238.76,160.53 0 bottom
LOGO1  SFE_LOGO_FLAME.2_INCH  [SFE_LOGO_FLAME_.2]  30.48,42.42 0 top
LOGO2  OSHW-LOGOS  [OSHW-LOGO-S]  12.7,8.64 0 bottom
LOGO3  SFE_LOGO_NAME_FLAME.1_INCH  [SFE_LOGO_NAME_FLAME_.1]  27.94,7.11 0 bottom
LOGO4  OSHW-LOGOS  [OSHW-LOGO-S]  43.69,8.64 0 bottom
LOGO5  SFE_LOGO_NAME_FLAME.1_INCH  [SFE_LOGO_NAME_FLAME_.1]  58.93,7.11 0 bottom
LOGO6  SFE_LOGO_FLAME.2_INCH  [SFE_LOGO_FLAME_.2]  61.47,42.42 0 top
LOGO7  OSHW-LOGOS  [OSHW-LOGO-S]  74.68,8.64 0 bottom
LOGO8  SFE_LOGO_NAME_FLAME.1_INCH  [SFE_LOGO_NAME_FLAME_.1]  89.92,7.11 0 bottom
LOGO9  SFE_LOGO_FLAME.2_INCH  [SFE_LOGO_FLAME_.2]  92.46,42.42 0 top
LOGO10  OSHW-LOGOS  [OSHW-LOGO-S]  105.66,8.64 0 bottom
LOGO11  SFE_LOGO_NAME_FLAME.1_INCH  [SFE_LOGO_NAME_FLAME_.1]  120.9,7.11 0 bottom
LOGO12  SFE_LOGO_FLAME.2_INCH  [SFE_LOGO_FLAME_.2]  123.44,42.42 0 top
LOGO13  OSHW-LOGOS  [OSHW-LOGO-S]  12.7,53.59 0 bottom
LOGO14  SFE_LOGO_NAME_FLAME.1_INCH  [SFE_LOGO_NAME_FLAME_.1]  27.94,52.07 0 bottom
LOGO15  SFE_LOGO_FLAME.2_INCH  [SFE_LOGO_FLAME_.2]  30.48,87.38 0 top
LOGO16  OSHW-LOGOS  [OSHW-LOGO-S]  43.69,53.59 0 bottom
LOGO17  SFE_LOGO_NAME_FLAME.1_INCH  [SFE_LOGO_NAME_FLAME_.1]  58.93,52.07 0 bottom
LOGO18  SFE_LOGO_FLAME.2_INCH  [SFE_LOGO_FLAME_.2]  61.47,87.38 0 top
LOGO19  OSHW-LOGOS  [OSHW-LOGO-S]  74.68,53.59 0 bottom
LOGO20  SFE_LOGO_NAME_FLAME.1_INCH  [SFE_LOGO_NAME_FLAME_.1]  89.92,52.07 0 bottom
LOGO21  SFE_LOGO_FLAME.2_INCH  [SFE_LOGO_FLAME_.2]  92.46,87.38 0 top
LOGO22  OSHW-LOGOS  [OSHW-LOGO-S]  105.66,53.59 0 bottom
LOGO23  SFE_LOGO_NAME_FLAME.1_INCH  [SFE_LOGO_NAME_FLAME_.1]  120.9,52.07 0 bottom
LOGO24  SFE_LOGO_FLAME.2_INCH  [SFE_LOGO_FLAME_.2]  123.44,87.38 0 top
LOGO25  OSHW-LOGOS  [OSHW-LOGO-S]  150.37,8.64 0 bottom
LOGO26  SFE_LOGO_NAME_FLAME.1_INCH  [SFE_LOGO_NAME_FLAME_.1]  165.61,7.11 0 bottom
LOGO27  SFE_LOGO_FLAME.2_INCH  [SFE_LOGO_FLAME_.2]  168.15,42.42 0 top
LOGO28  OSHW-LOGOS  [OSHW-LOGO-S]  181.36,8.64 0 bottom
LOGO29  SFE_LOGO_NAME_FLAME.1_INCH  [SFE_LOGO_NAME_FLAME_.1]  196.6,7.11 0 bottom
LOGO30  SFE_LOGO_FLAME.2_INCH  [SFE_LOGO_FLAME_.2]  199.14,42.42 0 top
LOGO31  OSHW-LOGOS  [OSHW-LOGO-S]  212.34,8.64 0 bottom
LOGO32  SFE_LOGO_NAME_FLAME.1_INCH  [SFE_LOGO_NAME_FLAME_.1]  227.58,7.11 0 bottom
LOGO33  SFE_LOGO_FLAME.2_INCH  [SFE_LOGO_FLAME_.2]  230.12,42.42 0 top
LOGO34  OSHW-LOGOS  [OSHW-LOGO-S]  243.33,8.64 0 bottom
LOGO35  SFE_LOGO_NAME_FLAME.1_INCH  [SFE_LOGO_NAME_FLAME_.1]  258.57,7.11 0 bottom
LOGO36  SFE_LOGO_FLAME.2_INCH  [SFE_LOGO_FLAME_.2]  261.11,42.42 0 top
LOGO37  OSHW-LOGOS  [OSHW-LOGO-S]  150.37,53.59 0 bottom
LOGO38  SFE_LOGO_NAME_FLAME.1_INCH  [SFE_LOGO_NAME_FLAME_.1]  165.61,52.07 0 bottom
LOGO39  SFE_LOGO_FLAME.2_INCH  [SFE_LOGO_FLAME_.2]  168.15,87.38 0 top
LOGO40  OSHW-LOGOS  [OSHW-LOGO-S]  181.36,53.59 0 bottom
LOGO41  SFE_LOGO_NAME_FLAME.1_INCH  [SFE_LOGO_NAME_FLAME_.1]  196.6,52.07 0 bottom
LOGO42  SFE_LOGO_FLAME.2_INCH  [SFE_LOGO_FLAME_.2]  199.14,87.38 0 top
LOGO43  OSHW-LOGOS  [OSHW-LOGO-S]  212.34,53.59 0 bottom
LOGO44  SFE_LOGO_NAME_FLAME.1_INCH  [SFE_LOGO_NAME_FLAME_.1]  227.58,52.07 0 bottom
LOGO45  SFE_LOGO_FLAME.2_INCH  [SFE_LOGO_FLAME_.2]  230.12,87.38 0 top
LOGO46  OSHW-LOGOS  [OSHW-LOGO-S]  243.33,53.59 0 bottom
LOGO47  SFE_LOGO_NAME_FLAME.1_INCH  [SFE_LOGO_NAME_FLAME_.1]  258.57,52.07 0 bottom
LOGO48  SFE_LOGO_FLAME.2_INCH  [SFE_LOGO_FLAME_.2]  261.11,87.38 0 top
LOGO49  OSHW-LOGOS  [OSHW-LOGO-S]  12.7,112.27 0 bottom
LOGO50  SFE_LOGO_NAME_FLAME.1_INCH  [SFE_LOGO_NAME_FLAME_.1]  27.94,110.74 0 bottom
LOGO51  SFE_LOGO_FLAME.2_INCH  [SFE_LOGO_FLAME_.2]  30.48,146.05 0 top
LOGO52  OSHW-LOGOS  [OSHW-LOGO-S]  43.69,112.27 0 bottom
LOGO53  SFE_LOGO_NAME_FLAME.1_INCH  [SFE_LOGO_NAME_FLAME_.1]  58.93,110.74 0 bottom
LOGO54  SFE_LOGO_FLAME.2_INCH  [SFE_LOGO_FLAME_.2]  61.47,146.05 0 top
LOGO55  OSHW-LOGOS  [OSHW-LOGO-S]  74.68,112.27 0 bottom
LOGO56  SFE_LOGO_NAME_FLAME.1_INCH  [SFE_LOGO_NAME_FLAME_.1]  89.92,110.74 0 bottom
LOGO57  SFE_LOGO_FLAME.2_INCH  [SFE_LOGO_FLAME_.2]  92.46,146.05 0 top
LOGO58  OSHW-LOGOS  [OSHW-LOGO-S]  105.66,112.27 0 bottom
LOGO59  SFE_LOGO_NAME_FLAME.1_INCH  [SFE_LOGO_NAME_FLAME_.1]  120.9,110.74 0 bottom
LOGO60  SFE_LOGO_FLAME.2_INCH  [SFE_LOGO_FLAME_.2]  123.44,146.05 0 top
LOGO61  OSHW-LOGOS  [OSHW-LOGO-S]  12.7,157.23 0 bottom
LOGO62  SFE_LOGO_NAME_FLAME.1_INCH  [SFE_LOGO_NAME_FLAME_.1]  27.94,155.7 0 bottom
LOGO63  SFE_LOGO_FLAME.2_INCH  [SFE_LOGO_FLAME_.2]  30.48,191.01 0 top
LOGO64  OSHW-LOGOS  [OSHW-LOGO-S]  43.69,157.23 0 bottom
LOGO65  SFE_LOGO_NAME_FLAME.1_INCH  [SFE_LOGO_NAME_FLAME_.1]  58.93,155.7 0 bottom
LOGO66  SFE_LOGO_FLAME.2_INCH  [SFE_LOGO_FLAME_.2]  61.47,191.01 0 top
LOGO67  OSHW-LOGOS  [OSHW-LOGO-S]  74.68,157.23 0 bottom
LOGO68  SFE_LOGO_NAME_FLAME.1_INCH  [SFE_LOGO_NAME_FLAME_.1]  89.92,155.7 0 bottom
LOGO69  SFE_LOGO_FLAME.2_INCH  [SFE_LOGO_FLAME_.2]  92.46,191.01 0 top
LOGO70  OSHW-LOGOS  [OSHW-LOGO-S]  105.66,157.23 0 bottom
LOGO71  SFE_LOGO_NAME_FLAME.1_INCH  [SFE_LOGO_NAME_FLAME_.1]  120.9,155.7 0 bottom
LOGO72  SFE_LOGO_FLAME.2_INCH  [SFE_LOGO_FLAME_.2]  123.44,191.01 0 top
LOGO73  OSHW-LOGOS  [OSHW-LOGO-S]  150.37,112.27 0 bottom
LOGO74  SFE_LOGO_NAME_FLAME.1_INCH  [SFE_LOGO_NAME_FLAME_.1]  165.61,110.74 0 bottom
LOGO75  SFE_LOGO_FLAME.2_INCH  [SFE_LOGO_FLAME_.2]  168.15,146.05 0 top
LOGO76  OSHW-LOGOS  [OSHW-LOGO-S]  181.36,112.27 0 bottom
LOGO77  SFE_LOGO_NAME_FLAME.1_INCH  [SFE_LOGO_NAME_FLAME_.1]  196.6,110.74 0 bottom
LOGO78  SFE_LOGO_FLAME.2_INCH  [SFE_LOGO_FLAME_.2]  199.14,146.05 0 top
LOGO79  OSHW-LOGOS  [OSHW-LOGO-S]  212.34,112.27 0 bottom
LOGO80  SFE_LOGO_NAME_FLAME.1_INCH  [SFE_LOGO_NAME_FLAME_.1]  227.58,110.74 0 bottom
LOGO81  SFE_LOGO_FLAME.2_INCH  [SFE_LOGO_FLAME_.2]  230.12,146.05 0 top
LOGO82  OSHW-LOGOS  [OSHW-LOGO-S]  243.33,112.27 0 bottom
LOGO83  SFE_LOGO_NAME_FLAME.1_INCH  [SFE_LOGO_NAME_FLAME_.1]  258.57,110.74 0 bottom
LOGO84  SFE_LOGO_FLAME.2_INCH  [SFE_LOGO_FLAME_.2]  261.11,146.05 0 top
LOGO85  OSHW-LOGOS  [OSHW-LOGO-S]  150.37,157.23 0 bottom
LOGO86  SFE_LOGO_NAME_FLAME.1_INCH  [SFE_LOGO_NAME_FLAME_.1]  165.61,155.7 0 bottom
LOGO87  SFE_LOGO_FLAME.2_INCH  [SFE_LOGO_FLAME_.2]  168.15,191.01 0 top
LOGO88  OSHW-LOGOS  [OSHW-LOGO-S]  181.36,157.23 0 bottom
LOGO89  SFE_LOGO_NAME_FLAME.1_INCH  [SFE_LOGO_NAME_FLAME_.1]  196.6,155.7 0 bottom
LOGO90  SFE_LOGO_FLAME.2_INCH  [SFE_LOGO_FLAME_.2]  199.14,191.01 0 top
LOGO91  OSHW-LOGOS  [OSHW-LOGO-S]  212.34,157.23 0 bottom
LOGO92  SFE_LOGO_NAME_FLAME.1_INCH  [SFE_LOGO_NAME_FLAME_.1]  227.58,155.7 0 bottom
LOGO93  SFE_LOGO_FLAME.2_INCH  [SFE_LOGO_FLAME_.2]  230.12,191.01 0 top
LOGO94  OSHW-LOGOS  [OSHW-LOGO-S]  243.33,157.23 0 bottom
LOGO95  SFE_LOGO_NAME_FLAME.1_INCH  [SFE_LOGO_NAME_FLAME_.1]  258.57,155.7 0 bottom
LOGO96  SFE_LOGO_FLAME.2_INCH  [SFE_LOGO_FLAME_.2]  261.11,191.01 0 top
R1  10K  [0603-RES]  13.21,22.1 270 top
R2  10K  [0603-RES]  10.67,22.1 270 top
R3  10k  [0603-RES]  15.75,22.1 270 top
R4  10k  [0603-RES]  18.29,22.1 270 top
R5  10k  [0603-RES]  23.37,22.1 270 top
R6  10k  [0603-RES]  20.83,22.1 270 top
R7  10K  [0603-RES]  44.2,22.1 270 top
R8  10K  [0603-RES]  41.66,22.1 270 top
R9  10k  [0603-RES]  46.74,22.1 270 top
R10  10k  [0603-RES]  49.28,22.1 270 top
R11  10k  [0603-RES]  54.36,22.1 270 top
R12  10k  [0603-RES]  51.82,22.1 270 top
R13  10K  [0603-RES]  75.18,22.1 270 top
R14  10K  [0603-RES]  72.64,22.1 270 top
R15  10k  [0603-RES]  77.72,22.1 270 top
R16  10k  [0603-RES]  80.26,22.1 270 top
R17  10k  [0603-RES]  85.34,22.1 270 top
R18  10k  [0603-RES]  82.8,22.1 270 top
R19  10K  [0603-RES]  106.17,22.1 270 top
R20  10K  [0603-RES]  103.63,22.1 270 top
R21  10k  [0603-RES]  108.71,22.1 270 top
R22  10k  [0603-RES]  111.25,22.1 270 top
R23  10k  [0603-RES]  116.33,22.1 270 top
R24  10k  [0603-RES]  113.79,22.1 270 top
R25  10K  [0603-RES]  13.21,67.06 270 top
R26  10K  [0603-RES]  10.67,67.06 270 top
R27  10k  [0603-RES]  15.75,67.06 270 top
R28  10k  [0603-RES]  18.29,67.06 270 top
R29  10k  [0603-RES]  23.37,67.06 270 top
R30  10k  [0603-RES]  20.83,67.06 270 top
R31  10K  [0603-RES]  44.2,67.06 270 top
R32  10K  [0603-RES]  41.66,67.06 270 top
R33  10k  [0603-RES]  46.74,67.06 270 top
R34  10k  [0603-RES]  49.28,67.06 270 top
R35  10k  [0603-RES]  54.36,67.06 270 top
R36  10k  [0603-RES]  51.82,67.06 270 top
R37  10K  [0603-RES]  75.18,67.06 270 top
R38  10K  [0603-RES]  72.64,67.06 270 top
R39  10k  [0603-RES]  77.72,67.06 270 top
R40  10k  [0603-RES]  80.26,67.06 270 top
R41  10k  [0603-RES]  85.34,67.06 270 top
R42  10k  [0603-RES]  82.8,67.06 270 top
R43  10K  [0603-RES]  106.17,67.06 270 top
R44  10K  [0603-RES]  103.63,67.06 270 top
R45  10k  [0603-RES]  108.71,67.06 270 top
R46  10k  [0603-RES]  111.25,67.06 270 top
R47  10k  [0603-RES]  116.33,67.06 270 top
R48  10k  [0603-RES]  113.79,67.06 270 top
R49  10K  [0603-RES]  150.88,22.1 270 top
R50  10K  [0603-RES]  148.34,22.1 270 top
R51  10k  [0603-RES]  153.42,22.1 270 top
R52  10k  [0603-RES]  155.96,22.1 270 top
R53  10k  [0603-RES]  161.04,22.1 270 top
R54  10k  [0603-RES]  158.5,22.1 270 top
R55  10K  [0603-RES]  181.86,22.1 270 top
R56  10K  [0603-RES]  179.32,22.1 270 top
R57  10k  [0603-RES]  184.4,22.1 270 top
R58  10k  [0603-RES]  186.94,22.1 270 top
R59  10k  [0603-RES]  192.02,22.1 270 top
R60  10k  [0603-RES]  189.48,22.1 270 top
R61  10K  [0603-RES]  212.85,22.1 270 top
R62  10K  [0603-RES]  210.31,22.1 270 top
R63  10k  [0603-RES]  215.39,22.1 270 top
R64  10k  [0603-RES]  217.93,22.1 270 top
R65  10k  [0603-RES]  223.01,22.1 270 top
R66  10k  [0603-RES]  220.47,22.1 270 top
R67  10K  [0603-RES]  243.84,22.1 270 top
R68  10K  [0603-RES]  241.3,22.1 270 top
R69  10k  [0603-RES]  246.38,22.1 270 top
R70  10k  [0603-RES]  248.92,22.1 270 top
R71  10k  [0603-RES]  254,22.1 270 top
R72  10k  [0603-RES]  251.46,22.1 270 top
R73  10K  [0603-RES]  150.88,67.06 270 top
R74  10K  [0603-RES]  148.34,67.06 270 top
R75  10k  [0603-RES]  153.42,67.06 270 top
R76  10k  [0603-RES]  155.96,67.06 270 top
R77  10k  [0603-RES]  161.04,67.06 270 top
R78  10k  [0603-RES]  158.5,67.06 270 top
R79  10K  [0603-RES]  181.86,67.06 270 top
R80  10K  [0603-RES]  179.32,67.06 270 top
R81  10k  [0603-RES]  184.4,67.06 270 top
R82  10k  [0603-RES]  186.94,67.06 270 top
R83  10k  [0603-RES]  192.02,67.06 270 top
R84  10k  [0603-RES]  189.48,67.06 270 top
R85  10K  [0603-RES]  212.85,67.06 270 top
R86  10K  [0603-RES]  210.31,67.06 270 top
R87  10k  [0603-RES]  215.39,67.06 270 top
R88  10k  [0603-RES]  217.93,67.06 270 top
R89  10k  [0603-RES]  223.01,67.06 270 top
R90  10k  [0603-RES]  220.47,67.06 270 top
R91  10K  [0603-RES]  243.84,67.06 270 top
R92  10K  [0603-RES]  241.3,67.06 270 top
R93  10k  [0603-RES]  246.38,67.06 270 top
R94  10k  [0603-RES]  248.92,67.06 270 top
R95  10k  [0603-RES]  254,67.06 270 top
R96  10k  [0603-RES]  251.46,67.06 270 top
R97  10K  [0603-RES]  13.21,125.73 270 top
R98  10K  [0603-RES]  10.67,125.73 270 top
R99  10k  [0603-RES]  15.75,125.73 270 top
R100  10k  [0603-RES]  18.29,125.73 270 top
R101  10k  [0603-RES]  23.37,125.73 270 top
R102  10k  [0603-RES]  20.83,125.73 270 top
R103  10K  [0603-RES]  44.2,125.73 270 top
R104  10K  [0603-RES]  41.66,125.73 270 top
R105  10k  [0603-RES]  46.74,125.73 270 top
R106  10k  [0603-RES]  49.28,125.73 270 top
R107  10k  [0603-RES]  54.36,125.73 270 top
R108  10k  [0603-RES]  51.82,125.73 270 top
R109  10K  [0603-RES]  75.18,125.73 270 top
R110  10K  [0603-RES]  72.64,125.73 270 top
R111  10k  [0603-RES]  77.72,125.73 270 top
R112  10k  [0603-RES]  80.26,125.73 270 top
R113  10k  [0603-RES]  85.34,125.73 270 top
R114  10k  [0603-RES]  82.8,125.73 270 top
R115  10K  [0603-RES]  106.17,125.73 270 top
R116  10K  [0603-RES]  103.63,125.73 270 top
R117  10k  [0603-RES]  108.71,125.73 270 top
R118  10k  [0603-RES]  111.25,125.73 270 top
R119  10k  [0603-RES]  116.33,125.73 270 top
R120  10k  [0603-RES]  113.79,125.73 270 top
R121  10K  [0603-RES]  13.21,170.69 270 top
R122  10K  [0603-RES]  10.67,170.69 270 top
R123  10k  [0603-RES]  15.75,170.69 270 top
R124  10k  [0603-RES]  18.29,170.69 270 top
R125  10k  [0603-RES]  23.37,170.69 270 top
R126  10k  [0603-RES]  20.83,170.69 270 top
R127  10K  [0603-RES]  44.2,170.69 270 top
R128  10K  [0603-RES]  41.66,170.69 270 top
R129  10k  [0603-RES]  46.74,170.69 270 top
R130  10k  [0603-RES]  49.28,170.69 270 top
R131  10k  [0603-RES]  54.36,170.69 270 top
R132  10k  [0603-RES]  51.82,170.69 270 top
R133  10K  [0603-RES]  75.18,170.69 270 top
R134  10K  [0603-RES]  72.64,170.69 270 top
R135  10k  [0603-RES]  77.72,170.69 270 top
R136  10k  [0603-RES]  80.26,170.69 270 top
R137  10k  [0603-RES]  85.34,170.69 270 top
R138  10k  [0603-RES]  82.8,170.69 270 top
R139  10K  [0603-RES]  106.17,170.69 270 top
R140  10K  [0603-RES]  103.63,170.69 270 top
R141  10k  [0603-RES]  108.71,170.69 270 top
R142  10k  [0603-RES]  111.25,170.69 270 top
R143  10k  [0603-RES]  116.33,170.69 270 top
R144  10k  [0603-RES]  113.79,170.69 270 top
R145  10K  [0603-RES]  150.88,125.73 270 top
R146  10K  [0603-RES]  148.34,125.73 270 top
R147  10k  [0603-RES]  153.42,125.73 270 top
R148  10k  [0603-RES]  155.96,125.73 270 top
R149  10k  [0603-RES]  161.04,125.73 270 top
R150  10k  [0603-RES]  158.5,125.73 270 top
R151  10K  [0603-RES]  181.86,125.73 270 top
R152  10K  [0603-RES]  179.32,125.73 270 top
R153  10k  [0603-RES]  184.4,125.73 270 top
R154  10k  [0603-RES]  186.94,125.73 270 top
R155  10k  [0603-RES]  192.02,125.73 270 top
R156  10k  [0603-RES]  189.48,125.73 270 top
R157  10K  [0603-RES]  212.85,125.73 270 top
R158  10K  [0603-RES]  210.31,125.73 270 top
R159  10k  [0603-RES]  215.39,125.73 270 top
R160  10k  [0603-RES]  217.93,125.73 270 top
R161  10k  [0603-RES]  223.01,125.73 270 top
R162  10k  [0603-RES]  220.47,125.73 270 top
R163  10K  [0603-RES]  243.84,125.73 270 top
R164  10K  [0603-RES]  241.3,125.73 270 top
R165  10k  [0603-RES]  246.38,125.73 270 top
R166  10k  [0603-RES]  248.92,125.73 270 top
R167  10k  [0603-RES]  254,125.73 270 top
R168  10k  [0603-RES]  251.46,125.73 270 top
R169  10K  [0603-RES]  150.88,170.69 270 top
R170  10K  [0603-RES]  148.34,170.69 270 top
R171  10k  [0603-RES]  153.42,170.69 270 top
R172  10k  [0603-RES]  155.96,170.69 270 top
R173  10k  [0603-RES]  161.04,170.69 270 top
R174  10k  [0603-RES]  158.5,170.69 270 top
R175  10K  [0603-RES]  181.86,170.69 270 top
R176  10K  [0603-RES]  179.32,170.69 270 top
R177  10k  [0603-RES]  184.4,170.69 270 top
R178  10k  [0603-RES]  186.94,170.69 270 top
R179  10k  [0603-RES]  192.02,170.69 270 top
R180  10k  [0603-RES]  189.48,170.69 270 top
R181  10K  [0603-RES]  212.85,170.69 270 top
R182  10K  [0603-RES]  210.31,170.69 270 top
R183  10k  [0603-RES]  215.39,170.69 270 top
R184  10k  [0603-RES]  217.93,170.69 270 top
R185  10k  [0603-RES]  223.01,170.69 270 top
R186  10k  [0603-RES]  220.47,170.69 270 top
R187  10K  [0603-RES]  243.84,170.69 270 top
R188  10K  [0603-RES]  241.3,170.69 270 top
R189  10k  [0603-RES]  246.38,170.69 270 top
R190  10k  [0603-RES]  248.92,170.69 270 top
R191  10k  [0603-RES]  254,170.69 270 top
R192  10k  [0603-RES]  251.46,170.69 270 top
SJ1  JUMPER-PAD-3-NOYES_SILK  [PAD-JUMPER-3-NO_YES_SILK]  12.57,9.4 90 top
SJ2  [PAD-JUMPER-3-3OF3_NC_BY_TRACE_YES_SILK_FULL_BOX]  16.38,9.4 90 top
SJ3  JUMPER-PAD-2-NC_BY_PASTE  [PAD-JUMPER-2-NC_BY_PASTE_YES_SILK]  24,9.4 270 top
SJ4  JUMPER-PAD-2-NOYES_SILK  [PAD-JUMPER-2-NO_YES_SILK]  11.94,15.75 270 top
SJ5  JUMPER-PAD-2-NOYES_SILK  [PAD-JUMPER-2-NO_YES_SILK]  15.75,15.75 270 top
SJ6  JUMPER-PAD-2-NOYES_SILK  [PAD-JUMPER-2-NO_YES_SILK]  19.56,15.75 270 top
SJ7  JUMPER-PAD-2-NOYES_SILK  [PAD-JUMPER-2-NO_YES_SILK]  23.37,15.75 270 top
SJ8  JUMPER-PAD-3-2OF3_NC_BY_TRACE_SMALL  [PAD-JUMPER-3-2OF3_NC_BY_TRACE_YES_SILK_FULL_BOX]  9.4,27.18 90 top
SJ9  JUMPER-PAD-3-2OF3_NC_BY_TRACE_SMALL  [PAD-JUMPER-3-2OF3_NC_BY_TRACE_YES_SILK_FULL_BOX]  9.4,32.26 90 top
SJ10  JUMPER-PAD-2-NOYES_SILK  [PAD-JUMPER-2-NO_YES_SILK]  27.18,37.34 90 top
SJ11  JUMPER-PAD-2-NOYES_SILK  [PAD-JUMPER-2-NO_YES_SILK]  23.37,37.34 90 top
SJ12  JUMPER-PAD-2-NOYES_SILK  [PAD-JUMPER-2-NO_YES_SILK]  19.56,37.34 90 top
SJ13  JUMPER-PAD-2-NOYES_SILK  [PAD-JUMPER-2-NO_YES_SILK]  15.75,37.34 90 top
SJ14  JUMPER-PAD-2-NOYES_SILK  [PAD-JUMPER-2-NO_YES_SILK]  11.94,37.34 90 top
SJ15  JUMPER-PAD-2-NC_BY_PASTE  [PAD-JUMPER-2-NC_BY_PASTE_YES_SILK]  20.19,9.4 270 top
SJ16  JUMPER-PAD-2-NOYES_SILK  [PAD-JUMPER-2-NO_YES_SILK]  31.62,9.4 90 top
SJ17  JUMPER-PAD-2-NOYES_SILK  [PAD-JUMPER-2-NO_YES_SILK]  27.81,9.4 90 top
SJ18  JUMPER-PAD-2-NOYES_SILK  [PAD-JUMPER-2-NO_YES_SILK]  42.93,15.75 270 top
SJ19  JUMPER-PAD-2-NOYES_SILK  [PAD-JUMPER-2-NO_YES_SILK]  46.74,15.75 270 top
SJ20  JUMPER-PAD-2-NOYES_SILK  [PAD-JUMPER-2-NO_YES_SILK]  50.55,15.75 270 top
SJ21  JUMPER-PAD-2-NOYES_SILK  [PAD-JUMPER-2-NO_YES_SILK]  54.36,15.75 270 top
SJ22  JUMPER-PAD-2-NOYES_SILK  [PAD-JUMPER-2-NO_YES_SILK]  58.17,37.34 90 top
SJ23  JUMPER-PAD-2-NOYES_SILK  [PAD-JUMPER-2-NO_YES_SILK]  54.36,37.34 90 top
SJ24  JUMPER-PAD-2-NOYES_SILK  [PAD-JUMPER-2-NO_YES_SILK]  50.55,37.34 90 top
SJ25  JUMPER-PAD-2-NOYES_SILK  [PAD-JUMPER-2-NO_YES_SILK]  46.74,37.34 90 top
SJ26  JUMPER-PAD-2-NOYES_SILK  [PAD-JUMPER-2-NO_YES_SILK]  42.93,37.34 90 top
SJ27  JUMPER-PAD-3-2OF3_NC_BY_TRACE_SMALL  [PAD-JUMPER-3-2OF3_NC_BY_TRACE_YES_SILK_FULL_BOX]  40.39,27.18 90 top
SJ28  JUMPER-PAD-3-2OF3_NC_BY_TRACE_SMALL  [PAD-JUMPER-3-2OF3_NC_BY_TRACE_YES_SILK_FULL_BOX]  40.39,32.26 90 top
SJ29  [PAD-JUMPER-3-3OF3_NC_BY_TRACE_YES_SILK_FULL_BOX]  47.37,9.4 90 top
SJ30  JUMPER-PAD-3-NOYES_SILK  [PAD-JUMPER-3-NO_YES_SILK]  43.56,9.4 90 top
SJ31  JUMPER-PAD-2-NC_BY_PASTE  [PAD-JUMPER-2-NC_BY_PASTE_YES_SILK]  54.99,9.4 270 top
SJ32  JUMPER-PAD-2-NC_BY_PASTE  [PAD-JUMPER-2-NC_BY_PASTE_YES_SILK]  51.18,9.4 270 top
SJ33  JUMPER-PAD-2-NOYES_SILK  [PAD-JUMPER-2-NO_YES_SILK]  62.61,9.4 90 top
SJ34  JUMPER-PAD-2-NOYES_SILK  [PAD-JUMPER-2-NO_YES_SILK]  58.8,9.4 90 top
SJ35  JUMPER-PAD-2-NOYES_SILK  [PAD-JUMPER-2-NO_YES_SILK]  73.91,15.75 270 top
SJ36  JUMPER-PAD-2-NOYES_SILK  [PAD-JUMPER-2-NO_YES_SILK]  77.72,15.75 270 top
SJ37  JUMPER-PAD-2-NOYES_SILK  [PAD-JUMPER-2-NO_YES_SILK]  81.53,15.75 270 top
SJ38  JUMPER-PAD-2-NOYES_SILK  [PAD-JUMPER-2-NO_YES_SILK]  85.34,15.75 270 top
SJ39  JUMPER-PAD-2-NOYES_SILK  [PAD-JUMPER-2-NO_YES_SILK]  89.15,37.34 90 top
SJ40  JUMPER-PAD-2-NOYES_SILK  [PAD-JUMPER-2-NO_YES_SILK]  85.34,37.34 90 top
SJ41  JUMPER-PAD-2-NOYES_SILK  [PAD-JUMPER-2-NO_YES_SILK]  81.53,37.34 90 top
SJ42  JUMPER-PAD-2-NOYES_SILK  [PAD-JUMPER-2-NO_YES_SILK]  77.72,37.34 90 top
SJ43  JUMPER-PAD-2-NOYES_SILK  [PAD-JUMPER-2-NO_YES_SILK]  73.91,37.34 90 top
SJ44  JUMPER-PAD-3-2OF3_NC_BY_TRACE_SMALL  [PAD-JUMPER-3-2OF3_NC_BY_TRACE_YES_SILK_FULL_BOX]  71.37,27.18 90 top
SJ45  JUMPER-PAD-3-2OF3_NC_BY_TRACE_SMALL  [PAD-JUMPER-3-2OF3_NC_BY_TRACE_YES_SILK_FULL_BOX]  71.37,32.26 90 top
SJ46  [PAD-JUMPER-3-3OF3_NC_BY_TRACE_YES_SILK_FULL_BOX]  78.36,9.4 90 top
SJ47  JUMPER-PAD-3-NOYES_SILK  [PAD-JUMPER-3-NO_YES_SILK]  74.55,9.4 90 top
SJ48  JUMPER-PAD-2-NC_BY_PASTE  [PAD-JUMPER-2-NC_BY_PASTE_YES_SILK]  85.98,9.4 270 top
SJ49  JUMPER-PAD-2-NC_BY_PASTE  [PAD-JUMPER-2-NC_BY_PASTE_YES_SILK]  82.17,9.4 270 top
SJ50  JUMPER-PAD-2-NOYES_SILK  [PAD-JUMPER-2-NO_YES_SILK]  93.6,9.4 90 top
SJ51  JUMPER-PAD-2-NOYES_SILK  [PAD-JUMPER-2-NO_YES_SILK]  89.79,9.4 90 top
SJ52  JUMPER-PAD-2-NOYES_SILK  [PAD-JUMPER-2-NO_YES_SILK]  104.9,15.75 270 top
SJ53  JUMPER-PAD-2-NOYES_SILK  [PAD-JUMPER-2-NO_YES_SILK]  108.71,15.75 270 top
SJ54  JUMPER-PAD-2-NOYES_SILK  [PAD-JUMPER-2-NO_YES_SILK]  112.52,15.75 270 top
SJ55  JUMPER-PAD-2-NOYES_SILK  [PAD-JUMPER-2-NO_YES_SILK]  116.33,15.75 270 top
SJ56  JUMPER-PAD-2-NOYES_SILK  [PAD-JUMPER-2-NO_YES_SILK]  120.14,37.34 90 top
SJ57  JUMPER-PAD-2-NOYES_SILK  [PAD-JUMPER-2-NO_YES_SILK]  116.33,37.34 90 top
SJ58  JUMPER-PAD-2-NOYES_SILK  [PAD-JUMPER-2-NO_YES_SILK]  112.52,37.34 90 top
SJ59  JUMPER-PAD-2-NOYES_SILK  [PAD-JUMPER-2-NO_YES_SILK]  108.71,37.34 90 top
SJ60  JUMPER-PAD-2-NOYES_SILK  [PAD-JUMPER-2-NO_YES_SILK]  104.9,37.34 90 top
SJ61  JUMPER-PAD-3-2OF3_NC_BY_TRACE_SMALL  [PAD-JUMPER-3-2OF3_NC_BY_TRACE_YES_SILK_FULL_BOX]  102.36,27.18 90 top
SJ62  JUMPER-PAD-3-2OF3_NC_BY_TRACE_SMALL  [PAD-JUMPER-3-2OF3_NC_BY_TRACE_YES_SILK_FULL_BOX]  102.36,32.26 90 top
SJ63  [PAD-JUMPER-3-3OF3_NC_BY_TRACE_YES_SILK_FULL_BOX]  109.35,9.4 90 top
SJ64  JUMPER-PAD-3-NOYES_SILK  [PAD-JUMPER-3-NO_YES_SILK]  105.54,9.4 90 top
SJ65  JUMPER-PAD-2-NC_BY_PASTE  [PAD-JUMPER-2-NC_BY_PASTE_YES_SILK]  116.97,9.4 270 top
SJ66  JUMPER-PAD-2-NC_BY_PASTE  [PAD-JUMPER-2-NC_BY_PASTE_YES_SILK]  113.16,9.4 270 top
SJ67  JUMPER-PAD-2-NOYES_SILK  [PAD-JUMPER-2-NO_YES_SILK]  124.59,9.4 90 top
SJ68  JUMPER-PAD-2-NOYES_SILK  [PAD-JUMPER-2-NO_YES_SILK]  120.78,9.4 90 top
SJ69  JUMPER-PAD-2-NOYES_SILK  [PAD-JUMPER-2-NO_YES_SILK]  11.94,60.71 270 top
SJ70  JUMPER-PAD-2-NOYES_SILK  [PAD-JUMPER-2-NO_YES_SILK]  15.75,60.71 270 top
SJ71  JUMPER-PAD-2-NOYES_SILK  [PAD-JUMPER-2-NO_YES_SILK]  19.56,60.71 270 top
SJ72  JUMPER-PAD-2-NOYES_SILK  [PAD-JUMPER-2-NO_YES_SILK]  23.37,60.71 270 top
SJ73  JUMPER-PAD-2-NOYES_SILK  [PAD-JUMPER-2-NO_YES_SILK]  27.18,82.3 90 top
SJ74  JUMPER-PAD-2-NOYES_SILK  [PAD-JUMPER-2-NO_YES_SILK]  23.37,82.3 90 top
SJ75  JUMPER-PAD-2-NOYES_SILK  [PAD-JUMPER-2-NO_YES_SILK]  19.56,82.3 90 top
SJ76  JUMPER-PAD-2-NOYES_SILK  [PAD-JUMPER-2-NO_YES_SILK]  15.75,82.3 90 top
SJ77  JUMPER-PAD-2-NOYES_SILK  [PAD-JUMPER-2-NO_YES_SILK]  11.94,82.3 90 top
SJ78  JUMPER-PAD-3-2OF3_NC_BY_TRACE_SMALL  [PAD-JUMPER-3-2OF3_NC_BY_TRACE_YES_SILK_FULL_BOX]  9.4,72.14 90 top
SJ79  JUMPER-PAD-3-2OF3_NC_BY_TRACE_SMALL  [PAD-JUMPER-3-2OF3_NC_BY_TRACE_YES_SILK_FULL_BOX]  9.4,77.22 90 top
SJ80  [PAD-JUMPER-3-3OF3_NC_BY_TRACE_YES_SILK_FULL_BOX]  16.38,54.36 90 top
SJ81  JUMPER-PAD-3-NOYES_SILK  [PAD-JUMPER-3-NO_YES_SILK]  12.57,54.36 90 top
SJ82  JUMPER-PAD-2-NC_BY_PASTE  [PAD-JUMPER-2-NC_BY_PASTE_YES_SILK]  24,54.36 270 top
SJ83  JUMPER-PAD-2-NC_BY_PASTE  [PAD-JUMPER-2-NC_BY_PASTE_YES_SILK]  20.19,54.36 270 top
SJ84  JUMPER-PAD-2-NOYES_SILK  [PAD-JUMPER-2-NO_YES_SILK]  31.62,54.36 90 top
SJ85  JUMPER-PAD-2-NOYES_SILK  [PAD-JUMPER-2-NO_YES_SILK]  27.81,54.36 90 top
SJ86  JUMPER-PAD-2-NOYES_SILK  [PAD-JUMPER-2-NO_YES_SILK]  42.93,60.71 270 top
SJ87  JUMPER-PAD-2-NOYES_SILK  [PAD-JUMPER-2-NO_YES_SILK]  46.74,60.71 270 top
SJ88  JUMPER-PAD-2-NOYES_SILK  [PAD-JUMPER-2-NO_YES_SILK]  50.55,60.71 270 top
SJ89  JUMPER-PAD-2-NOYES_SILK  [PAD-JUMPER-2-NO_YES_SILK]  54.36,60.71 270 top
SJ90  JUMPER-PAD-2-NOYES_SILK  [PAD-JUMPER-2-NO_YES_SILK]  58.17,82.3 90 top
SJ91  JUMPER-PAD-2-NOYES_SILK  [PAD-JUMPER-2-NO_YES_SILK]  54.36,82.3 90 top
SJ92  JUMPER-PAD-2-NOYES_SILK  [PAD-JUMPER-2-NO_YES_SILK]  50.55,82.3 90 top
SJ93  JUMPER-PAD-2-NOYES_SILK  [PAD-JUMPER-2-NO_YES_SILK]  46.74,82.3 90 top
SJ94  JUMPER-PAD-2-NOYES_SILK  [PAD-JUMPER-2-NO_YES_SILK]  42.93,82.3 90 top
SJ95  JUMPER-PAD-3-2OF3_NC_BY_TRACE_SMALL  [PAD-JUMPER-3-2OF3_NC_BY_TRACE_YES_SILK_FULL_BOX]  40.39,72.14 90 top
SJ96  JUMPER-PAD-3-2OF3_NC_BY_TRACE_SMALL  [PAD-JUMPER-3-2OF3_NC_BY_TRACE_YES_SILK_FULL_BOX]  40.39,77.22 90 top
SJ97  [PAD-JUMPER-3-3OF3_NC_BY_TRACE_YES_SILK_FULL_BOX]  47.37,54.36 90 top
SJ98  JUMPER-PAD-3-NOYES_SILK  [PAD-JUMPER-3-NO_YES_SILK]  43.56,54.36 90 top
SJ99  JUMPER-PAD-2-NC_BY_PASTE  [PAD-JUMPER-2-NC_BY_PASTE_YES_SILK]  54.99,54.36 270 top
SJ100  JUMPER-PAD-2-NC_BY_PASTE  [PAD-JUMPER-2-NC_BY_PASTE_YES_SILK]  51.18,54.36 270 top
SJ101  JUMPER-PAD-2-NOYES_SILK  [PAD-JUMPER-2-NO_YES_SILK]  62.61,54.36 90 top
SJ102  JUMPER-PAD-2-NOYES_SILK  [PAD-JUMPER-2-NO_YES_SILK]  58.8,54.36 90 top
SJ103  JUMPER-PAD-2-NOYES_SILK  [PAD-JUMPER-2-NO_YES_SILK]  73.91,60.71 270 top
SJ104  JUMPER-PAD-2-NOYES_SILK  [PAD-JUMPER-2-NO_YES_SILK]  77.72,60.71 270 top
SJ105  JUMPER-PAD-2-NOYES_SILK  [PAD-JUMPER-2-NO_YES_SILK]  81.53,60.71 270 top
SJ106  JUMPER-PAD-2-NOYES_SILK  [PAD-JUMPER-2-NO_YES_SILK]  85.34,60.71 270 top
SJ107  JUMPER-PAD-2-NOYES_SILK  [PAD-JUMPER-2-NO_YES_SILK]  89.15,82.3 90 top
SJ108  JUMPER-PAD-2-NOYES_SILK  [PAD-JUMPER-2-NO_YES_SILK]  85.34,82.3 90 top
SJ109  JUMPER-PAD-2-NOYES_SILK  [PAD-JUMPER-2-NO_YES_SILK]  81.53,82.3 90 top
SJ110  JUMPER-PAD-2-NOYES_SILK  [PAD-JUMPER-2-NO_YES_SILK]  77.72,82.3 90 top
SJ111  JUMPER-PAD-2-NOYES_SILK  [PAD-JUMPER-2-NO_YES_SILK]  73.91,82.3 90 top
SJ112  JUMPER-PAD-3-2OF3_NC_BY_TRACE_SMALL  [PAD-JUMPER-3-2OF3_NC_BY_TRACE_YES_SILK_FULL_BOX]  71.37,72.14 90 top
SJ113  JUMPER-PAD-3-2OF3_NC_BY_TRACE_SMALL  [PAD-JUMPER-3-2OF3_NC_BY_TRACE_YES_SILK_FULL_BOX]  71.37,77.22 90 top
SJ114  [PAD-JUMPER-3-3OF3_NC_BY_TRACE_YES_SILK_FULL_BOX]  78.36,54.36 90 top
SJ115  JUMPER-PAD-3-NOYES_SILK  [PAD-JUMPER-3-NO_YES_SILK]  74.55,54.36 90 top
SJ116  JUMPER-PAD-2-NC_BY_PASTE  [PAD-JUMPER-2-NC_BY_PASTE_YES_SILK]  85.98,54.36 270 top
SJ117  JUMPER-PAD-2-NC_BY_PASTE  [PAD-JUMPER-2-NC_BY_PASTE_YES_SILK]  82.17,54.36 270 top
SJ118  JUMPER-PAD-2-NOYES_SILK  [PAD-JUMPER-2-NO_YES_SILK]  93.6,54.36 90 top
SJ119  JUMPER-PAD-2-NOYES_SILK  [PAD-JUMPER-2-NO_YES_SILK]  89.79,54.36 90 top
SJ120  JUMPER-PAD-2-NOYES_SILK  [PAD-JUMPER-2-NO_YES_SILK]  104.9,60.71 270 top
SJ121  JUMPER-PAD-2-NOYES_SILK  [PAD-JUMPER-2-NO_YES_SILK]  108.71,60.71 270 top
SJ122  JUMPER-PAD-2-NOYES_SILK  [PAD-JUMPER-2-NO_YES_SILK]  112.52,60.71 270 top
SJ123  JUMPER-PAD-2-NOYES_SILK  [PAD-JUMPER-2-NO_YES_SILK]  116.33,60.71 270 top
SJ124  JUMPER-PAD-2-NOYES_SILK  [PAD-JUMPER-2-NO_YES_SILK]  120.14,82.3 90 top
SJ125  JUMPER-PAD-2-NOYES_SILK  [PAD-JUMPER-2-NO_YES_SILK]  116.33,82.3 90 top
SJ126  JUMPER-PAD-2-NOYES_SILK  [PAD-JUMPER-2-NO_YES_SILK]  112.52,82.3 90 top
SJ127  JUMPER-PAD-2-NOYES_SILK  [PAD-JUMPER-2-NO_YES_SILK]  108.71,82.3 90 top
SJ128  JUMPER-PAD-2-NOYES_SILK  [PAD-JUMPER-2-NO_YES_SILK]  104.9,82.3 90 top
SJ129  JUMPER-PAD-3-2OF3_NC_BY_TRACE_SMALL  [PAD-JUMPER-3-2OF3_NC_BY_TRACE_YES_SILK_FULL_BOX]  102.36,72.14 90 top
SJ130  JUMPER-PAD-3-2OF3_NC_BY_TRACE_SMALL  [PAD-JUMPER-3-2OF3_NC_BY_TRACE_YES_SILK_FULL_BOX]  102.36,77.22 90 top
SJ131  [PAD-JUMPER-3-3OF3_NC_BY_TRACE_YES_SILK_FULL_BOX]  109.35,54.36 90 top
SJ132  JUMPER-PAD-3-NOYES_SILK  [PAD-JUMPER-3-NO_YES_SILK]  105.54,54.36 90 top
SJ133  JUMPER-PAD-2-NC_BY_PASTE  [PAD-JUMPER-2-NC_BY_PASTE_YES_SILK]  116.97,54.36 270 top
SJ134  JUMPER-PAD-2-NC_BY_PASTE  [PAD-JUMPER-2-NC_BY_PASTE_YES_SILK]  113.16,54.36 270 top
SJ135  JUMPER-PAD-2-NOYES_SILK  [PAD-JUMPER-2-NO_YES_SILK]  124.59,54.36 90 top
SJ136  JUMPER-PAD-2-NOYES_SILK  [PAD-JUMPER-2-NO_YES_SILK]  120.78,54.36 90 top
SJ137  JUMPER-PAD-2-NOYES_SILK  [PAD-JUMPER-2-NO_YES_SILK]  149.61,15.75 270 top
SJ138  JUMPER-PAD-2-NOYES_SILK  [PAD-JUMPER-2-NO_YES_SILK]  153.42,15.75 270 top
SJ139  JUMPER-PAD-2-NOYES_SILK  [PAD-JUMPER-2-NO_YES_SILK]  157.23,15.75 270 top
SJ140  JUMPER-PAD-2-NOYES_SILK  [PAD-JUMPER-2-NO_YES_SILK]  161.04,15.75 270 top
SJ141  JUMPER-PAD-2-NOYES_SILK  [PAD-JUMPER-2-NO_YES_SILK]  164.85,37.34 90 top